# Altium PCB Pannel3.5x2 Ver1.0.PcbDoc (part 1 of 4)
Units mil, origin at the board's own origin, x right, y up, seen from the top; angles counter-clockwise.
Board outline 4133.86 x 2283.46 mil, 4 copper layers (SIGNAL, GROUND, PWR, SIGNAL (Bottom)), stack 61.627 mil thick; 222 components, 165 nets, 808 pads, 673 vias.
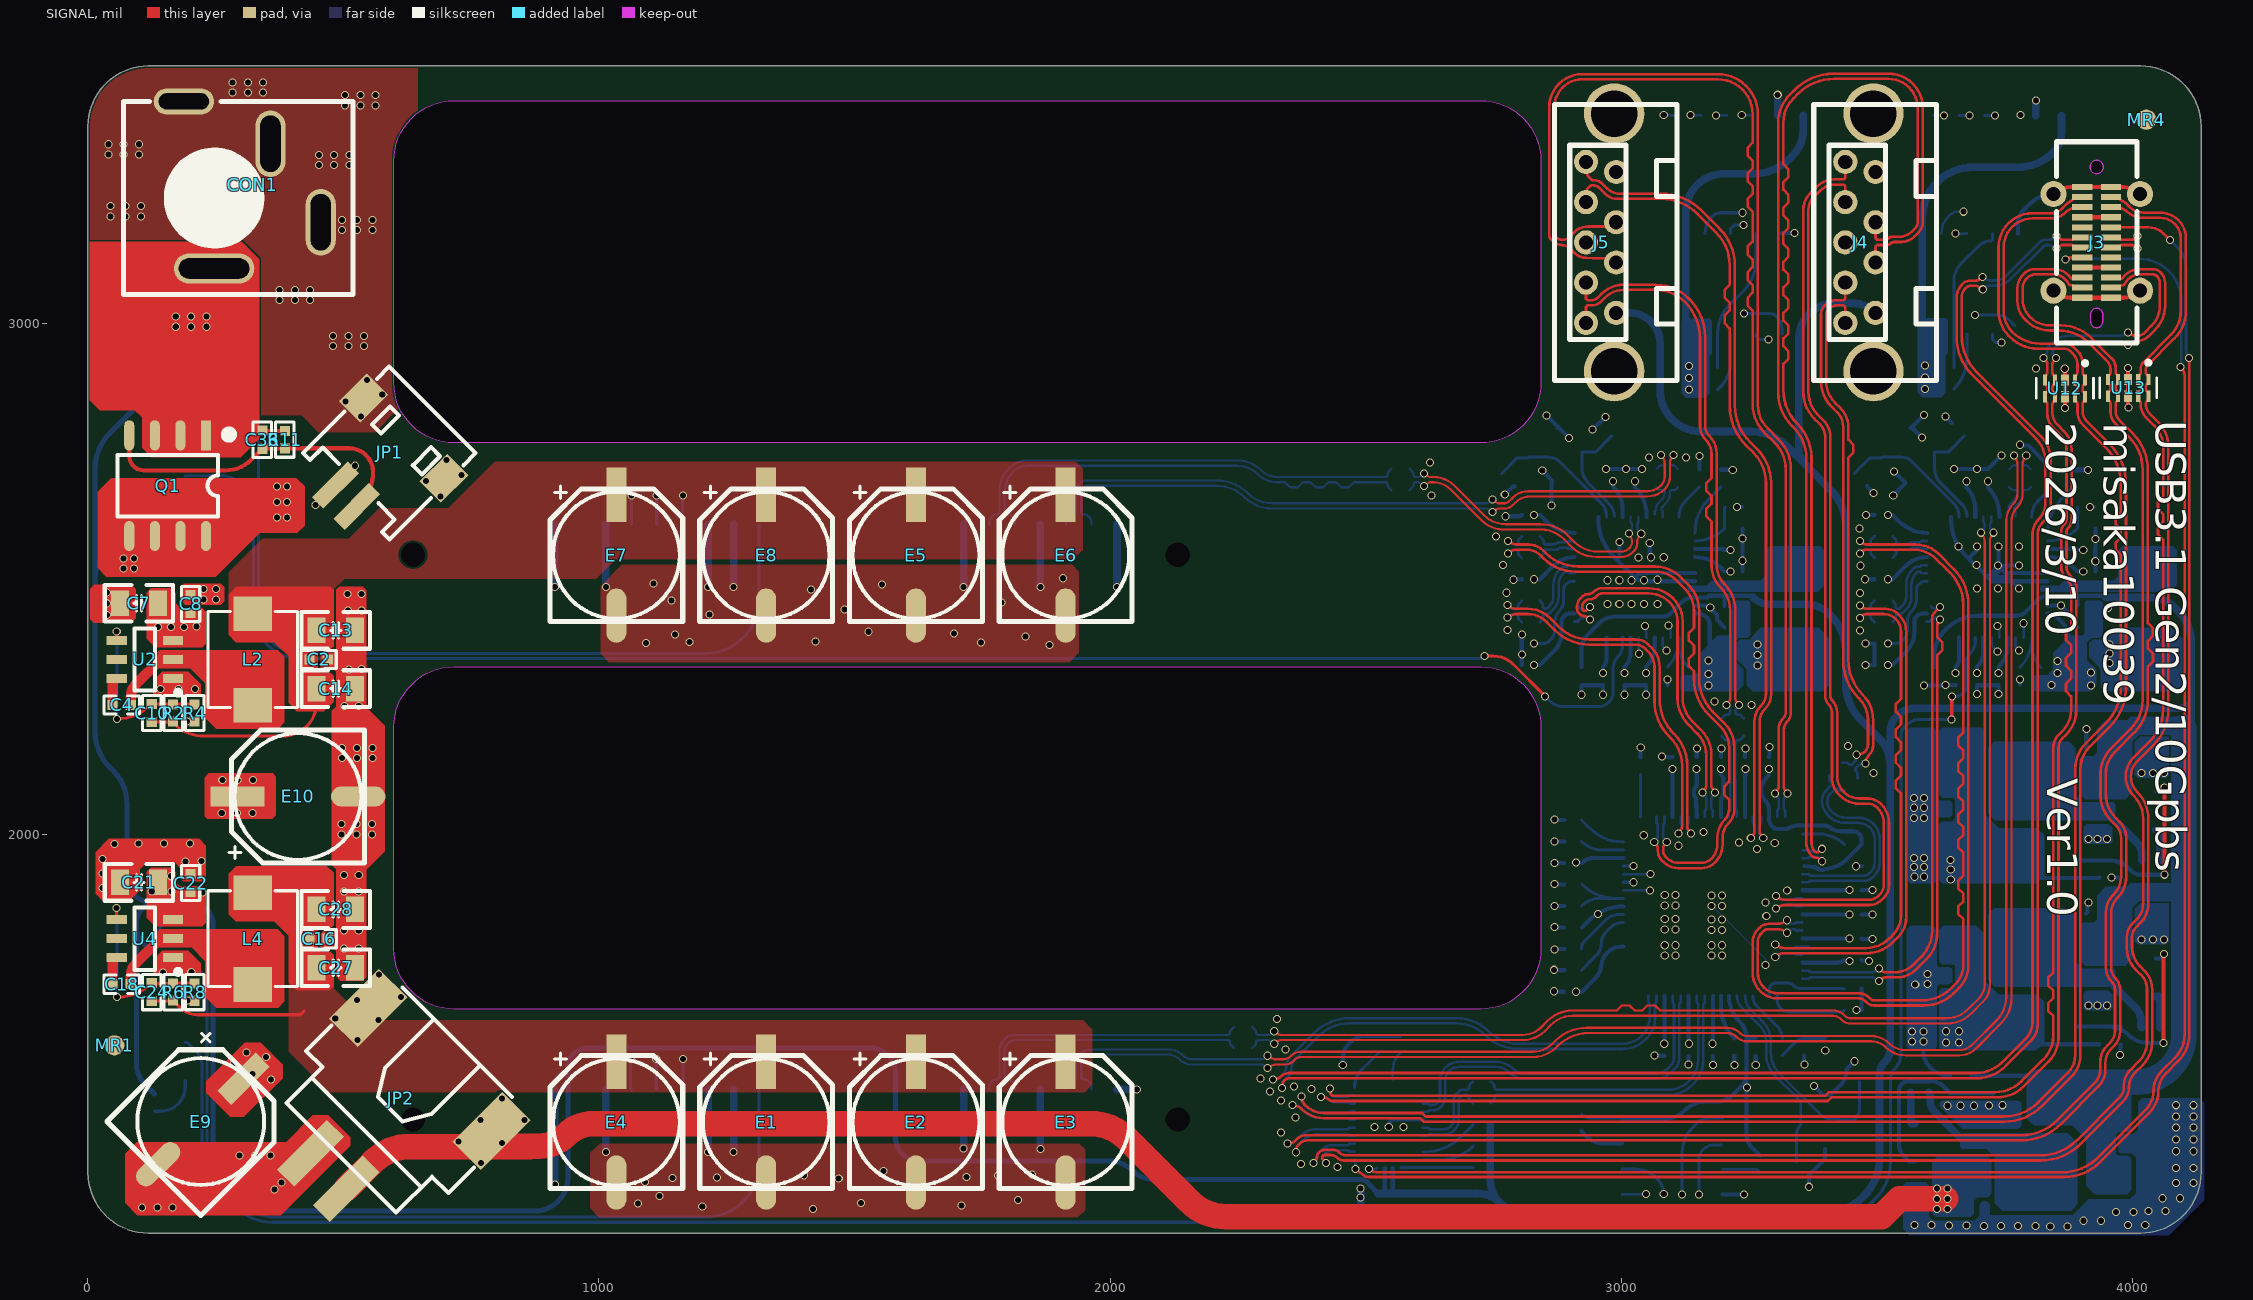
[diagram p0: SIGNAL view]
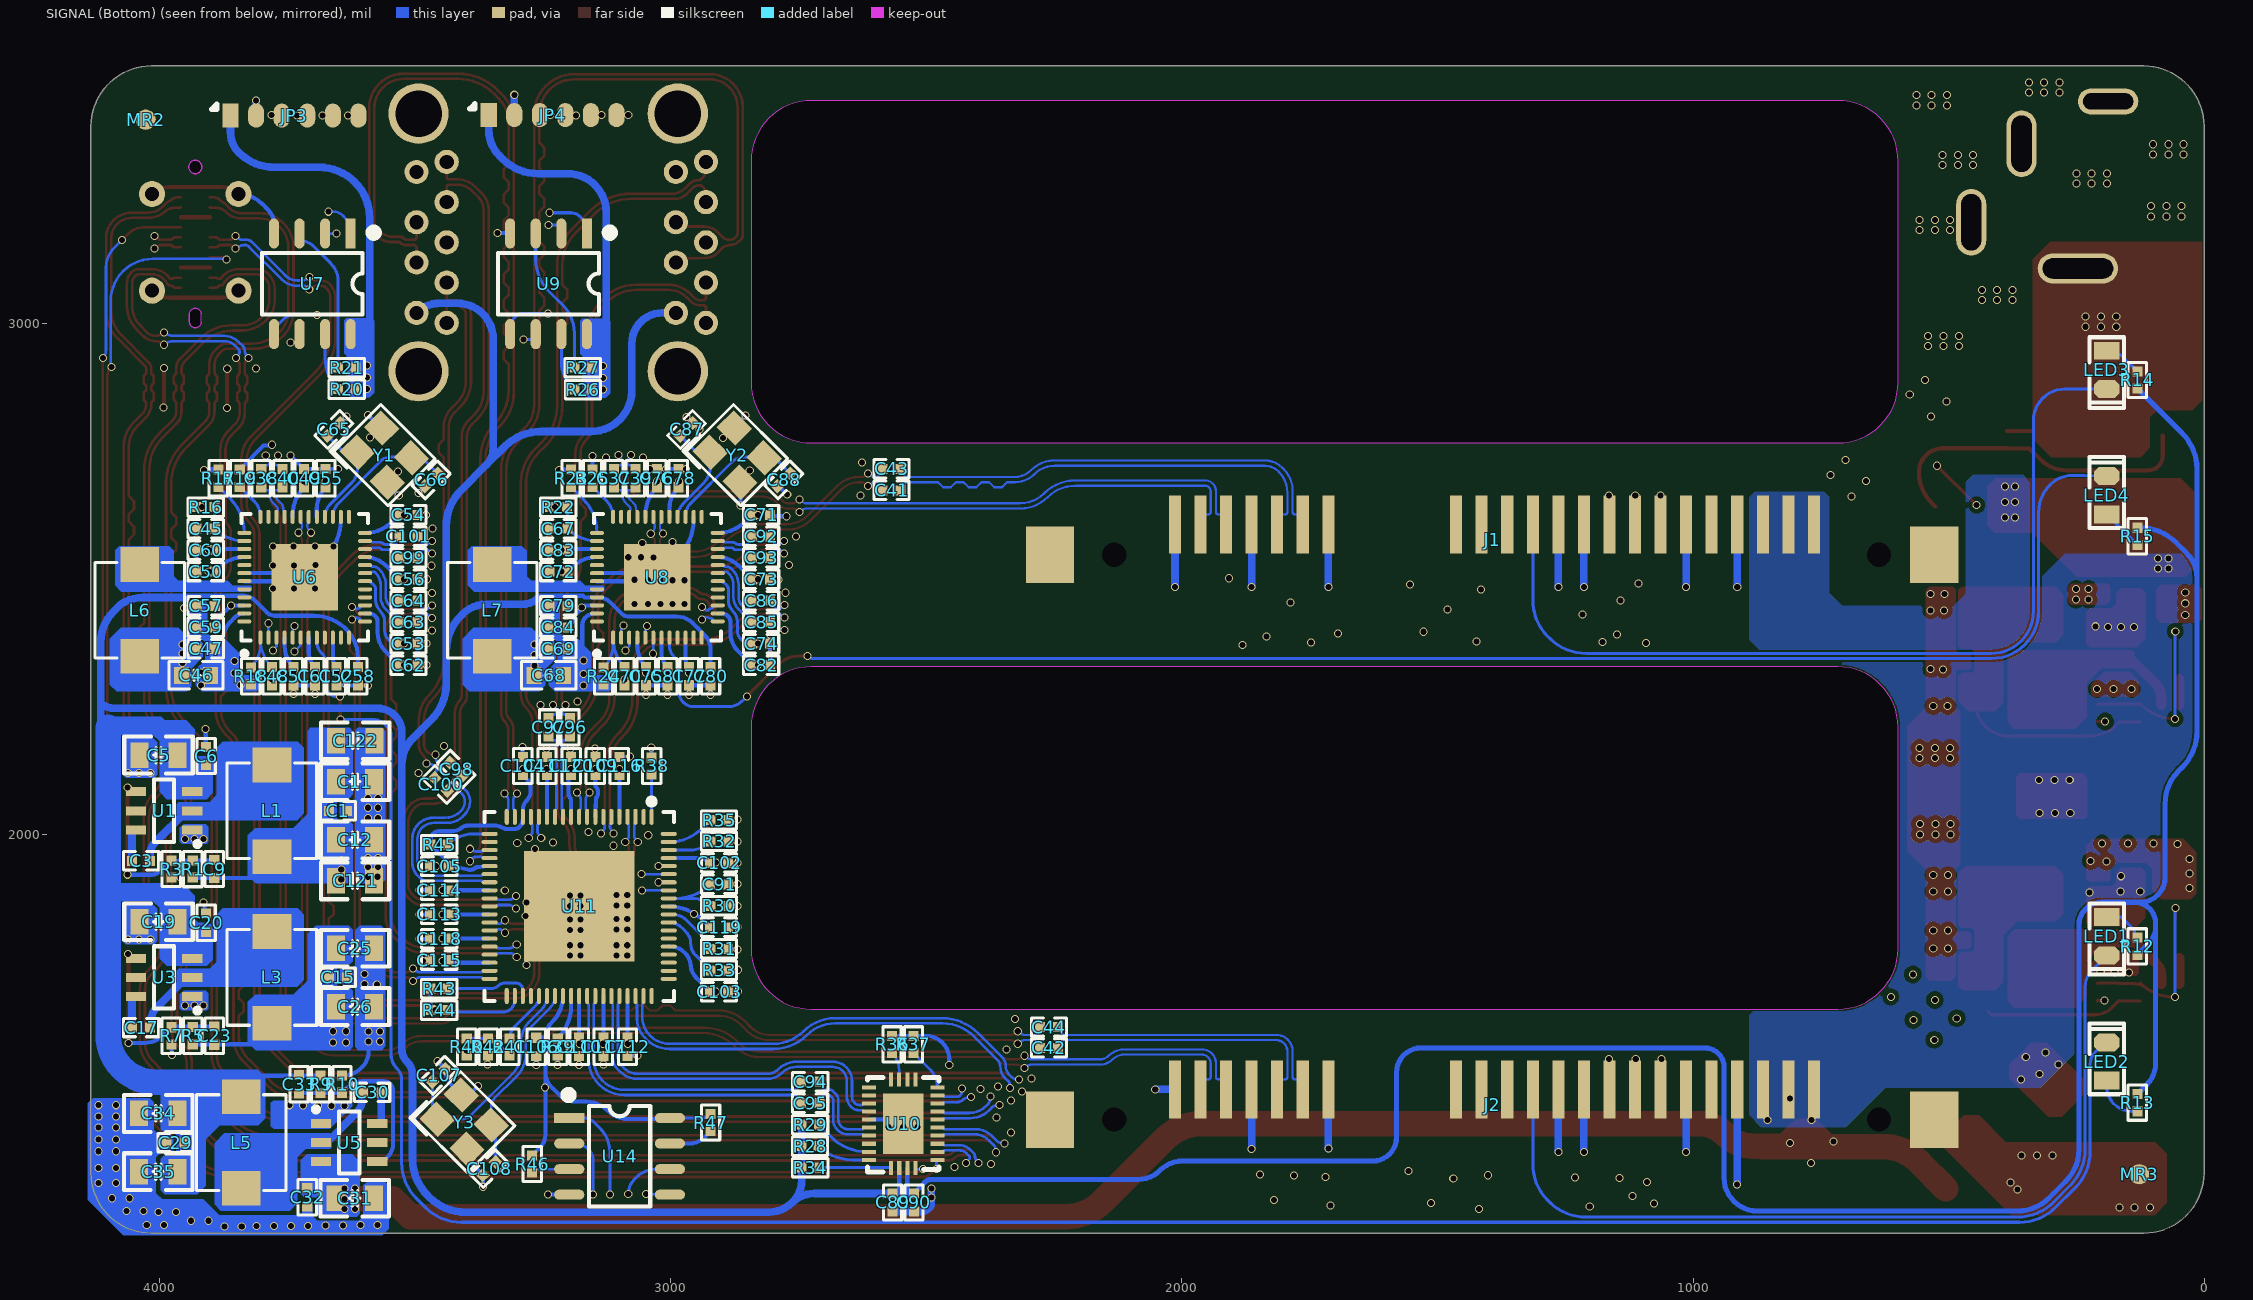
[diagram p1: SIGNAL (Bottom) view, seen from below]
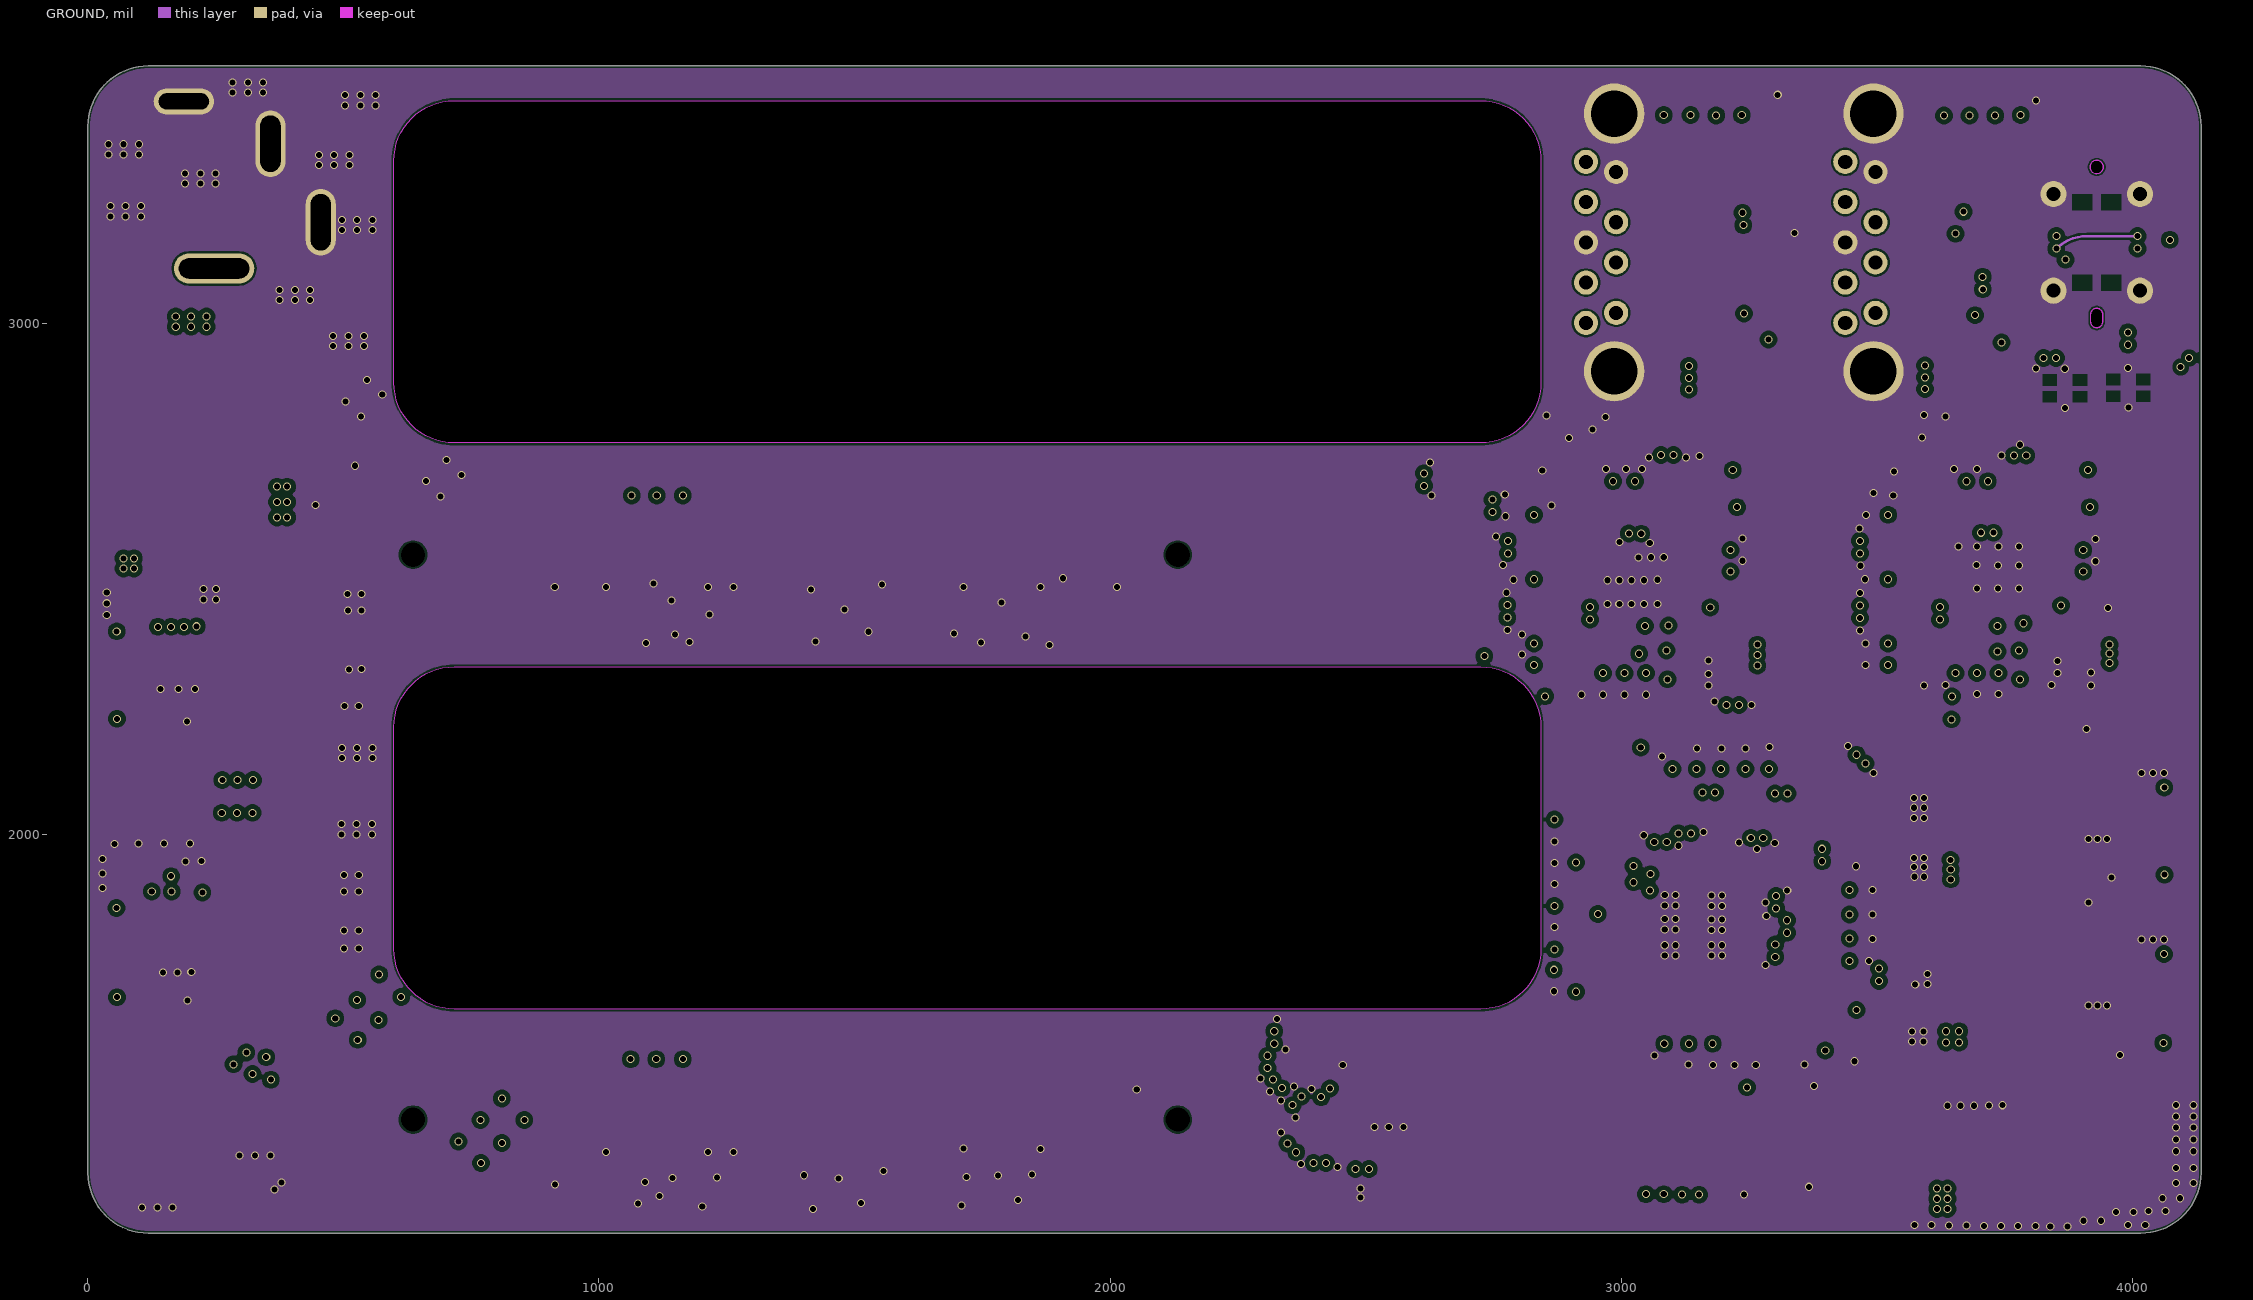
[diagram p2: GROUND]
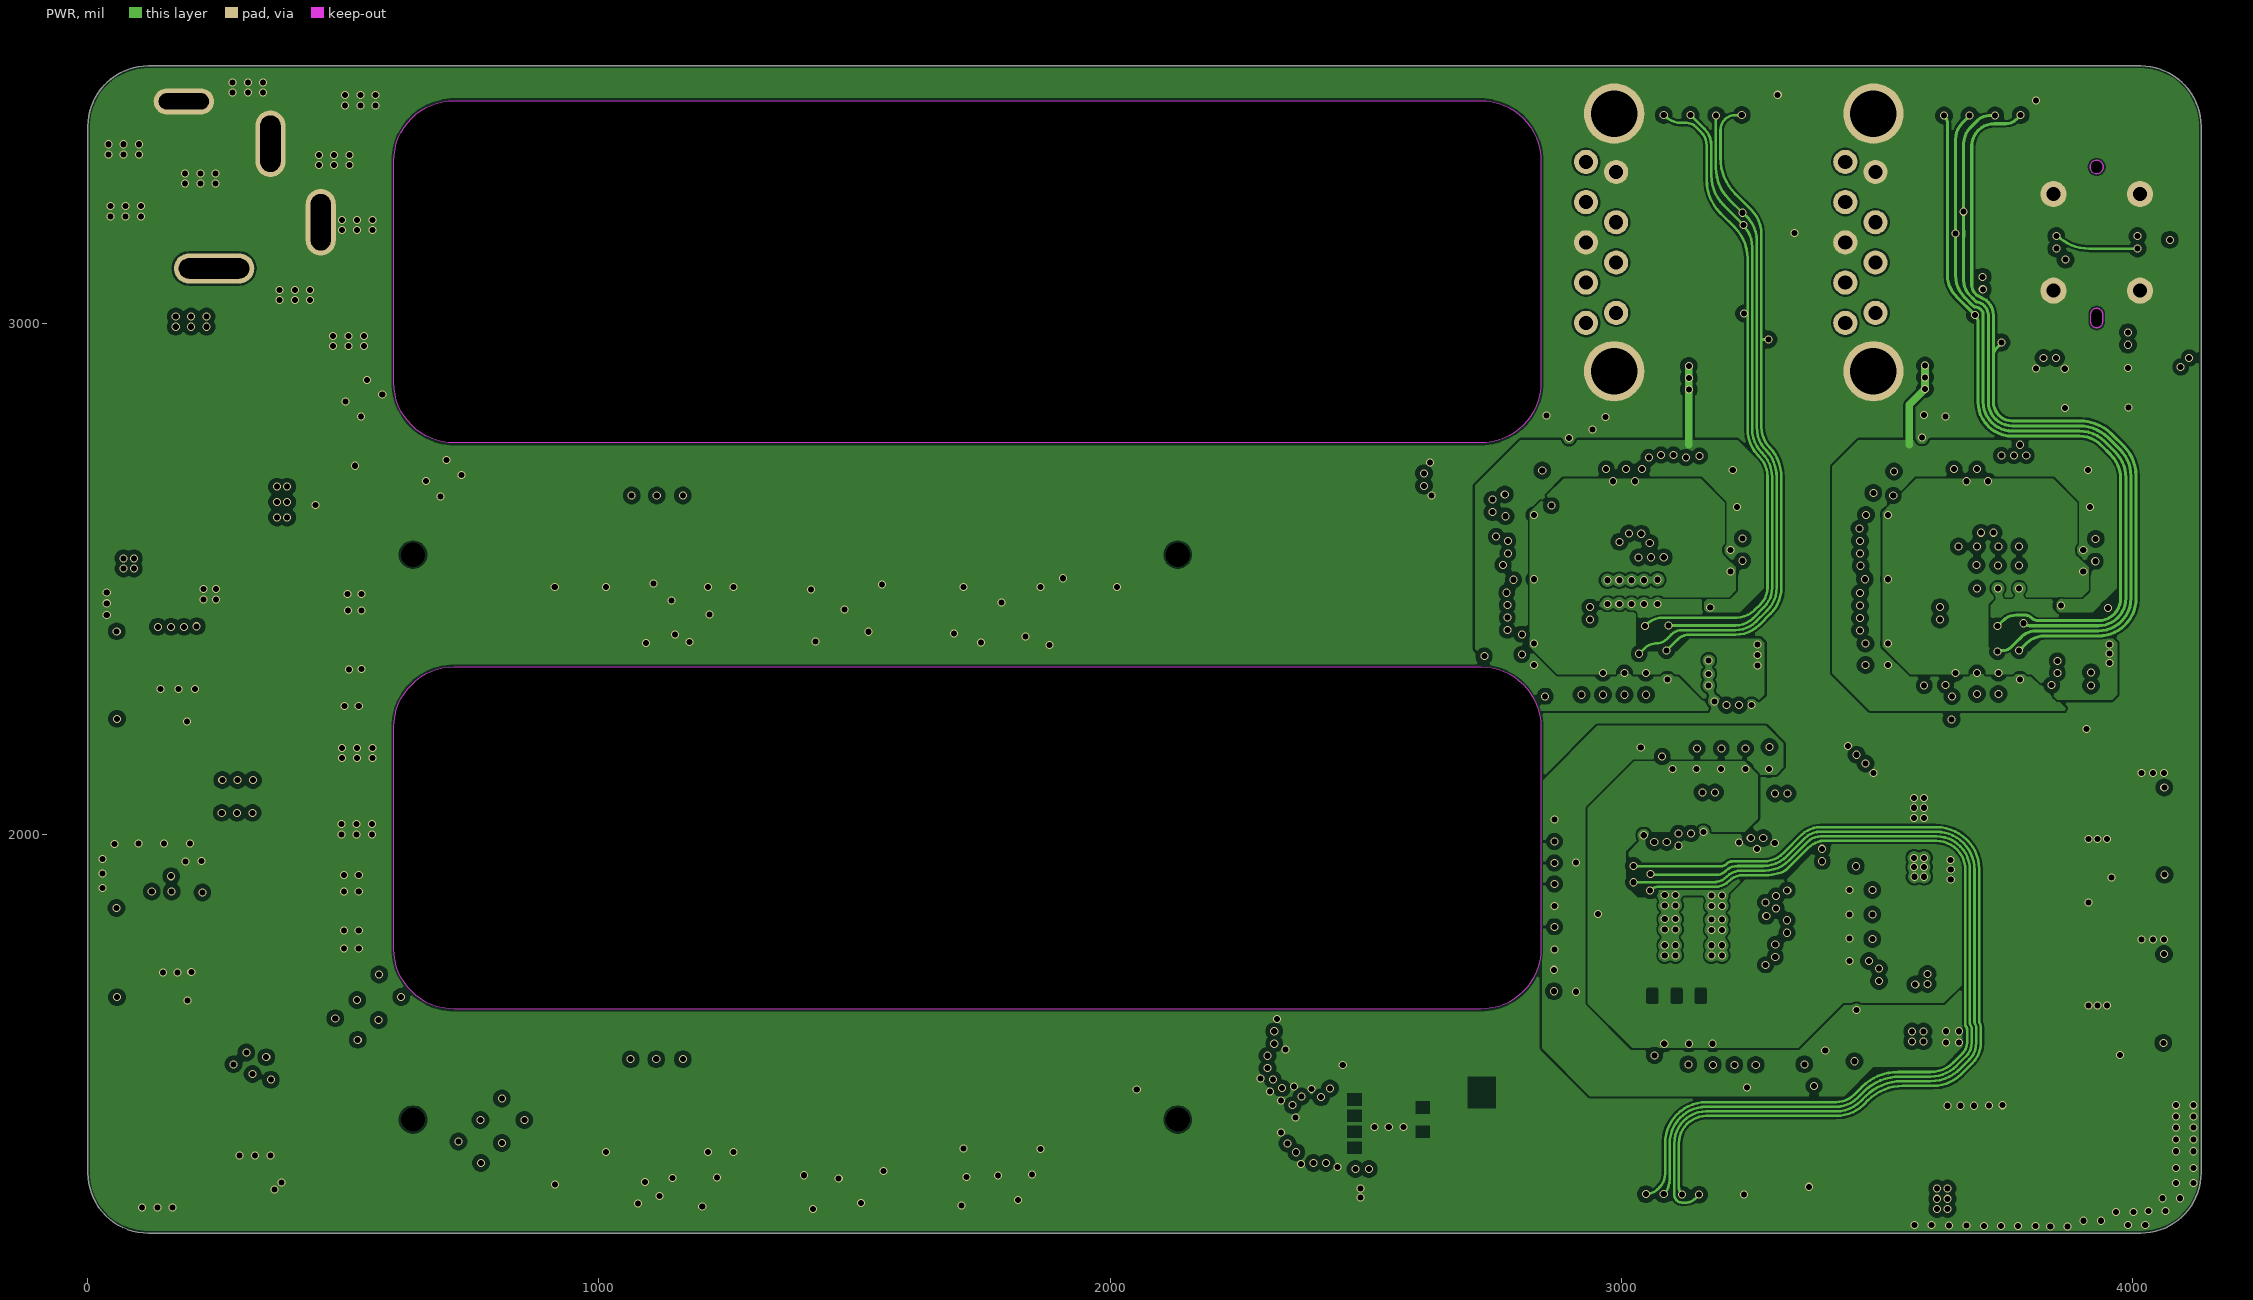
[diagram p3: PWR]
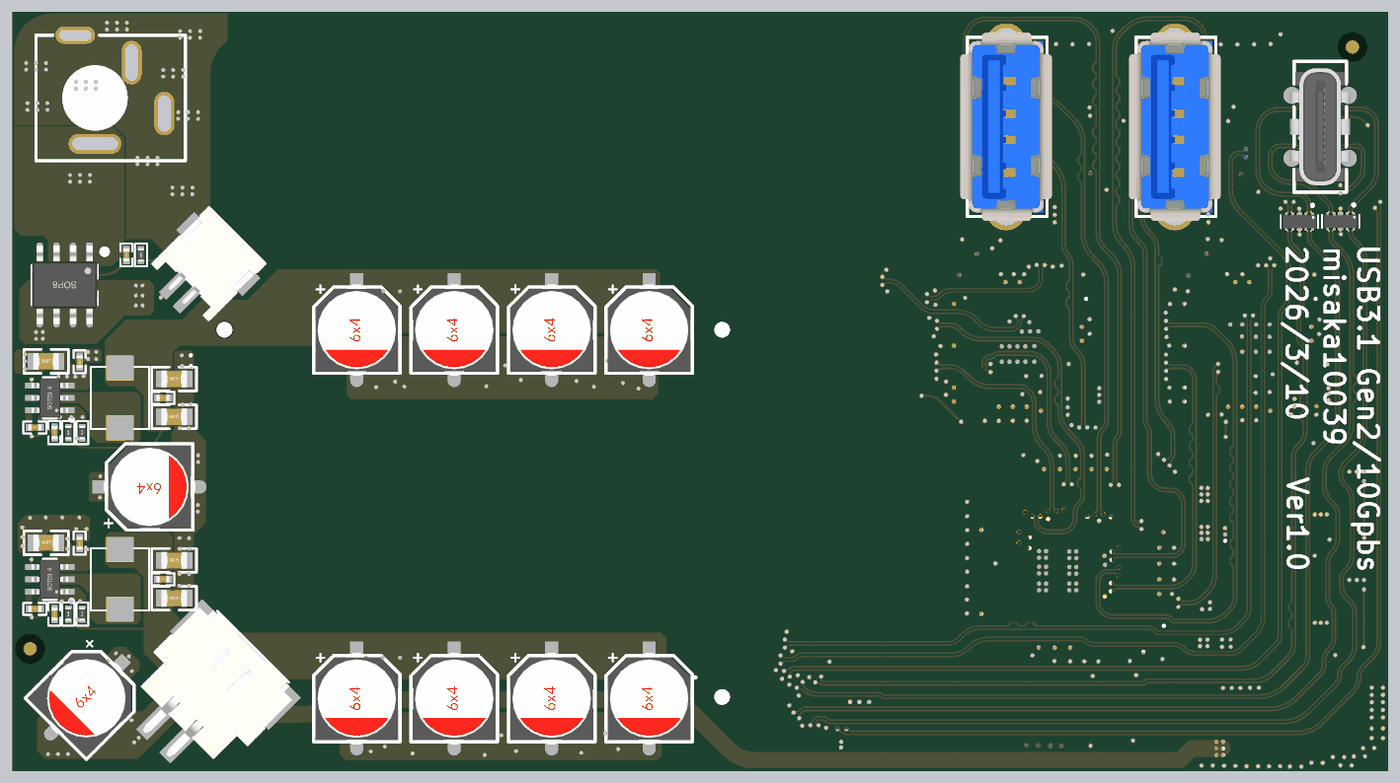
[diagram p7: 3D render of the assembled board from above, using the file's embedded part models]
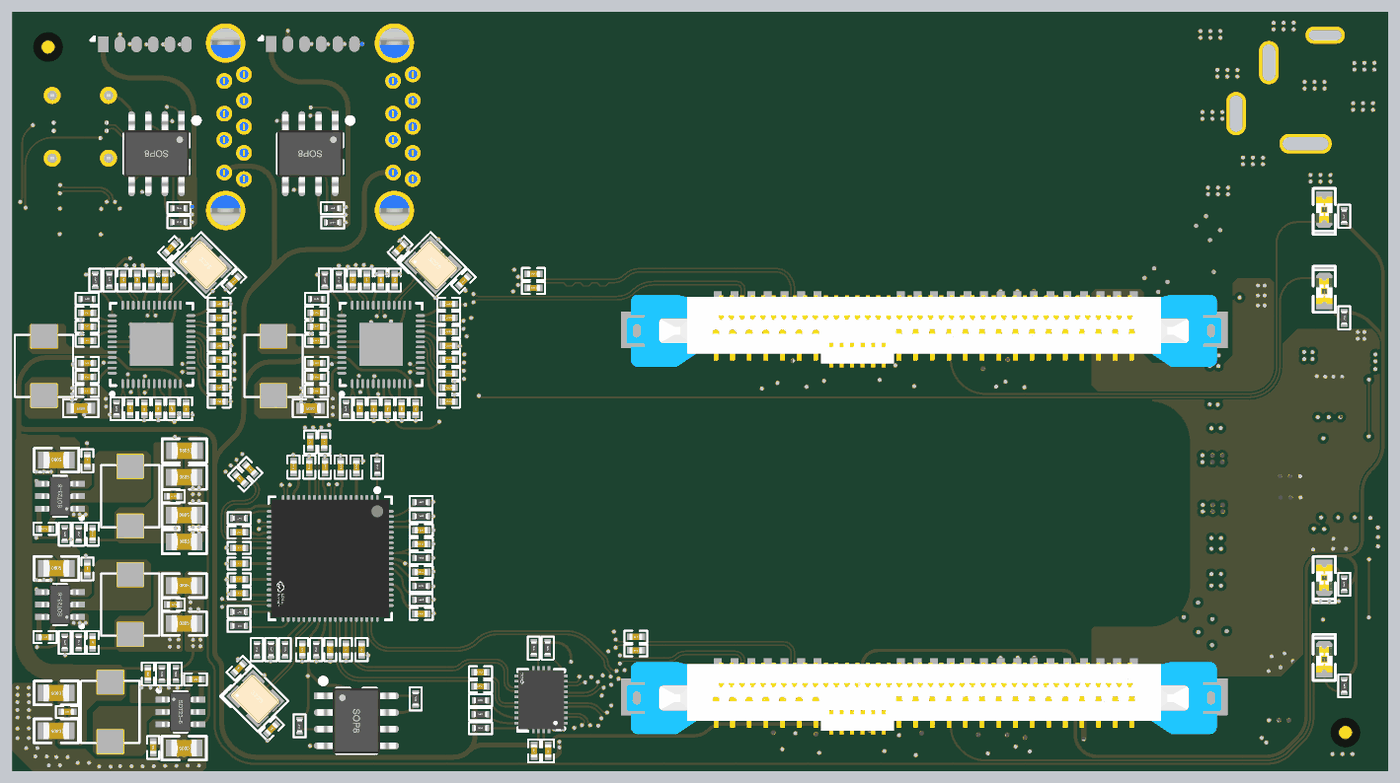
[diagram p8: 3D render of the assembled board from below, using the file's embedded part models]

## Layer stack, top to bottom
Top Solder: solder mask 0.3937, Solder Resist, Dk 3.5
SIGNAL: signal copper 1.4
Dielectric 2: prepreg 3.9134, PP-006, Dk 4.1
GROUND: signal copper 0.5984
Dielectric 1: dielectric 49.8031, FR-4, Dk 4.8
PWR: signal copper 0.5984
Dielectric 3: prepreg 3.9134, PP-006, Dk 4.1
SIGNAL (Bottom): signal copper 1.4
Bottom Solder: solder mask 0.3937, Solder Resist, Dk 3.5

## Board outline
118.36,1219.68 cw(c118.4,1337.84) 0.25,1337.79 0.25,3385.04 cw(c118.34,3385.06) 118.36,3503.15 4016,3503.15 cw(c4016.09,3385.13) 4134.11,3385.04 4134.11,1337.8 cw(c4016.02,1337.78) 4016,1219.69
cut-out: 716.79,2765.63 cw(c716.83,2883.78) 598.68,2883.74 598.68,3317.24 cw(c716.83,3317.2) 716.79,3435.35 2724.66,3435.35 cw(c2724.68,3317.27) 2842.77,3317.24 2842.77,2883.74 cw(c2724.68,2883.72) 2724.66,2765.63
cut-out: 716.79,1657.95 cw(c716.83,1776.11) 598.68,1776.06 598.68,2209.57 cw(c716.83,2209.52) 716.79,2327.68 2724.66,2327.68 cw(c2724.68,2209.59) 2842.77,2209.57 2842.77,1776.06 cw(c2724.68,1776.04) 2724.66,1657.95

## Design rules (kind name [scope] priority, off if disabled: settings)
BoardOutlineClearance [All] p1: gap=4 ignorepadtopadclearanceinfootprint=FALSE
Clearance [All] p1: gap=4 ignorepadtopadclearanceinfootprint=FALSE except(0: Arc-Text Arc-Hole Track-Text Track-Hole SMDPad-Text SMDPad-Hole THPad-Text THPad-Hole Via-Text Via-Hole Fill-Text Fill-Hole Poly-Text Poly-Hole Region-Text Region-Hole Text-Text Text-Hole; 8.66: Via-Via; 9.06: Via-Fill Via-Poly Via-Region)
ComponentClearance [All] p1: gap=0 collisioncheckmode=3 verticalgap=0 showdistances=FALSE
DiffPairsRouting "Schematic Differential Pairs Routing_1" [InNetClass('SATA')] p1: maxlimit=6 minlimit=6 mostfreqgap=6 toplayer_minwidth=4.29 toplayer_maxwidth=4.29 toplayer_prefwidth=4.29 midlayer1_minwidth=4.29 midlayer1_maxwidth=4.29 midlayer1_prefwidth=4.29 midlayer2_minwidth=4.29 midlayer2_maxwidth=4.29 midlayer2_prefwidth=4.29 bottomlayer_minwidth=4.29 bottomlayer_maxwidth=4.29 bottomlayer_prefwidth=4.29 maxuncoupledlength=500
DiffPairsRouting "Schematic Differential Pairs Routing" [InNetClass('USB')] p2: maxlimit=5 minlimit=5 mostfreqgap=5 toplayer_minwidth=5.1 toplayer_maxwidth=5.1 toplayer_prefwidth=5.1 midlayer1_minwidth=5.1 midlayer1_maxwidth=5.1 midlayer1_prefwidth=5.1 midlayer2_minwidth=5.1 midlayer2_maxwidth=5.1 midlayer2_prefwidth=5.1 bottomlayer_minwidth=5.1 bottomlayer_maxwidth=5.1 bottomlayer_prefwidth=5.1 maxuncoupledlength=500
DiffPairsRouting [All] p3: maxlimit=10 minlimit=10 mostfreqgap=10 toplayer_minwidth=15 toplayer_maxwidth=15 toplayer_prefwidth=15 midlayer1_minwidth=15 midlayer1_maxwidth=15 midlayer1_prefwidth=15 midlayer2_minwidth=15 midlayer2_maxwidth=15 midlayer2_prefwidth=15 bottomlayer_minwidth=15 bottomlayer_maxwidth=15 bottomlayer_prefwidth=15 maxuncoupledlength=500
MinimumSolderMaskSliver [All] p1: minsoldermaskwidth=0
NetAntennae [All] p1 off: netantennaetolerance=3.94
PlaneClearance [All] p1: clearance=8
PlaneConnect [All] p1: planeconnectstyle=Direct reliefexpansion=20 reliefentries=4 reliefconductorwidth=10 reliefairgap=10
PolygonConnect [All] p1: connectstyle=Direct reliefconductorwidth=10 reliefentries=4 polygonreliefangle="90 Angle" airgapwidth=10
RoutingVias "Schematic Routing Via Style_58" [InNetClass('USB')] p1: holewidth=11.81 width=15.75 viastyle="Through Hole" minholewidth=7.87 minwidth=11.81 maxholewidth=28 maxwidth=39.37
RoutingVias "Schematic Routing Via Style_1" [InNetClass('SATA')] p2: holewidth=11.81 width=15.75 viastyle="Through Hole" minholewidth=7.87 minwidth=11.81 maxholewidth=28 maxwidth=50
RoutingVias [All] p3: holewidth=11.81 width=15.75 viastyle="Through Hole" minholewidth=11.81 minwidth=15.75 maxholewidth=19.68 maxwidth=23.62
SilkToSolderMaskClearance [IsPad] p1: minsilkscreentomaskgap=0 clearancetoexposedcopper=TRUE
SolderMaskExpansion 过孔盖油 [isvia] p1: expansion=4 istentingtop=TRUE
Width [All] p1: maxlimit=100 minlimit=2 preferedwidth=6
23 further rules are at their usual default settings.

## Classes and differential pairs
net class USB: cap_SSRX1_N cap_SSRX1_P cap_SSRX4_N cap_SSRX4_P cap_SSTX1_N cap_SSTX1_P cap_SSTX2_N cap_SSTX2_P cap_SSTX3_N cap_SSTX3_P cap_SSTX4_N cap_SSTX4_P cap_SSTX_N cap_SSTX_P HSD1_N HSD1_P HSD2_N HSD2_P HSD3_N HSD3_P HSD4_N HSD4_P IN_CC1 IN_CC2 IN_SSRX1_N IN_SSRX1_P IN_SSRX2_N IN_SSRX2_P IN_SSTX1_N IN_SSTX1_P IN_SSTX2_N IN_SSTX2_P SSRX1_N SSRX1_P SSRX2_N SSRX2_P SSRX3_N SSRX3_P SSRX4_N SSRX4_P SSRX_N SSRX_P SSTX1_N SSTX1_P SSTX2_N SSTX2_P SSTX3_N SSTX3_P SSTX4_N SSTX4_P SSTX_N SSTX_P USBD_N USBD_P
net class SATA: cap_RX1_N cap_RX1_P cap_RX2_N cap_RX2_P cap_TX1_N cap_TX1_P cap_TX2_N cap_TX2_P RX1_N RX1_P RX2_N RX2_P TX1_N TX1_P TX2_N TX2_P
net class PWR: GND VBUS VCC1.05V-VL822 VCC1V2-B VCC1V2-C VCC3.3V-VL822 VCC5V-A VCC5V-B VCC12V VIN
component class vl822: C89 C90 C91 C92 C93 C94 C95 C96 C97 C98 C99 C100 C101 C102 C103 C104 C105 C106 C107 C108 C109 C110 C111 C112 C113 C114 C115 C116 C117 C118 C119 C120 R28 R29 R30 R31 R32 R33 R34 R35 R36 R37 R38 R39 R40 R41 R42 R43 R44 R45 R46 R47 U10 U11 U12 U13 U14 Y3
component class pwr: C1 C2 C3 C4 C5 C6 C7 C8 C9 C10 C11 C12 C13 C14 C15 C16 C17 C18 C19 C20 C21 C22 C23 C24 C25 C26 C27 C28 C29 C30 C31 C32 C33 C34 C35 C36 C121 C122 E1 E2 E3 E4 E5 E6 E7 E8 E9 E10 JP1 JP2 L1 L2 L3 L4 L5 MR1 MR2 MR3 MR4 Q1 R1 R2 R3 R4 R5 R6 R7 R8 R9 R10 R11 U1 U2 U3 U4 U5
component class jmb575: C45 C46 C47 C48 C49 C50 C51 C52 C53 C54 C55 C56 C57 C58 C59 C60 C61 C62 C63 C64 C65 C66 C67 C68 C69 C70 C71 C72 C73 C74 C75 C76 C77 C78 C79 C80 C81 C82 C83 C84 C85 C86 C87 C88 JP3 JP4 L6 L7 R16 R17 R18 R19 R20 R21 R22 R23 R24 R25 R26 R27 U6 U7 U8 U9 Y1 Y2
component class connector: C37 C38 C39 C40 C41 C42 C43 C44 CON1 J1 J2 J3 J4 J5 LED1 LED2 LED3 LED4 R12 R13 R14 R15
differential pair cap_TX1: +cap_TX1_P -cap_TX1_N
differential pair cap_RX1: +cap_RX1_P -cap_RX1_N
differential pair TX1: +TX1_P -TX1_N
differential pair RX1: +RX1_P -RX1_N
differential pair cap_SSRX1: +cap_SSRX1_P -cap_SSRX1_N
differential pair SSTX1: +SSTX1_P -SSTX1_N
differential pair cap_TX2: +cap_TX2_P -cap_TX2_N
differential pair cap_RX2: +cap_RX2_P -cap_RX2_N
differential pair USBD: +USBD_P -USBD_N
differential pair TX2: +TX2_P -TX2_N
differential pair SSTX: +SSTX_P -SSTX_N
differential pair SSTX4: +SSTX4_P -SSTX4_N
differential pair SSTX3: +SSTX3_P -SSTX3_N
differential pair SSTX2: +SSTX2_P -SSTX2_N
differential pair SSRX: +SSRX_P -SSRX_N
differential pair SSRX4: +SSRX4_P -SSRX4_N
differential pair SSRX3: +SSRX3_P -SSRX3_N
differential pair SSRX2: +SSRX2_P -SSRX2_N
differential pair SSRX1: +SSRX1_P -SSRX1_N
differential pair RX2: +RX2_P -RX2_N
differential pair IN_SSTX2: +IN_SSTX2_P -IN_SSTX2_N
differential pair IN_SSTX1: +IN_SSTX1_P -IN_SSTX1_N
differential pair IN_SSRX2: +IN_SSRX2_P -IN_SSRX2_N
differential pair IN_SSRX1: +IN_SSRX1_P -IN_SSRX1_N
differential pair HSD4: +HSD4_P -HSD4_N
differential pair HSD3: +HSD3_P -HSD3_N
differential pair HSD2: +HSD2_P -HSD2_N
differential pair HSD1: +HSD1_P -HSD1_N
differential pair cap_SSTX: +cap_SSTX_P -cap_SSTX_N
differential pair cap_SSTX4: +cap_SSTX4_P -cap_SSTX4_N
differential pair cap_SSTX3: +cap_SSTX3_P -cap_SSTX3_N
differential pair cap_SSTX2: +cap_SSTX2_P -cap_SSTX2_N
differential pair cap_SSTX1: +cap_SSTX1_P -cap_SSTX1_N
differential pair cap_SSRX3: +cap_SSRX4_P -cap_SSRX4_N

## Components (designator, comment, footprint, x,y, rotation, side; value= is the part's Value field where it differs from the comment)
C1 "100nF 50V" C0402_L 3651.08,2046 r180 bottom
C2 "100nF 50V" C0402_L 451.59,2342 r0 top
C3 "100nF 50V" C0402_L 4036,1948 r180 bottom
C4 "100nF 50V" C0402_L 66.28,2253 r0 top
C5 "22uF 10V" C0805_L 4002,2155 r180 bottom
C6 "100nF 50V" C0402_L 3909,2153 r270 bottom
C7 "22uF 25V" C0805_L 100,2452 r0 top
C8 "100nF 50V" C0402_L 201,2450.72 r270 top
C9 "150PF 50V" C0402_L 3893,1932 r270 bottom
C10 "68PF 50V" C0402_L 125,2237.27 r270 top
C11 "47uF 6.3V" C0805_L 3617.6,2103 r180 bottom
C12 "47uF 6.3V" C0805_L 3617.6,1989 r180 bottom
C13 "22uF 10V" C0805_L 485.08,2399 r0 top
C14 "22uF 10V" C0805_L 485.08,2285 r0 top
C15 "100nF 50V" C0402_L 3651.08,1720 r180 bottom
C16 "100nF 50V" C0402_L 451.59,1796 r0 top
C17 "100nF 50V" C0402_L 4036,1622 r180 bottom
C18 "100nF 50V" C0402_L 66.28,1707 r0 top
C19 "22uF 25V" C0805_L 4002,1829 r180 bottom
C20 "100nF 50V" C0402_L 3909,1827 r270 bottom
C21 "22uF 25V" C0805_L 100,1906 r0 top
C22 "100nF 50V" C0402_L 201,1904.72 r270 top
C23 "56PF 50V" C0402_L 3893,1606 r270 bottom
C24 "68PF 50V" C0402_L 125,1691.27 r270 top
C25 "47uF 6.3V" C0805_L 3617.6,1777 r180 bottom
C26 "47uF 6.3V" C0805_L 3617.6,1663 r180 bottom
C27 "22uF 10V" C0805_L 485.08,1739 r0 top
C28 "22uF 10V" C0805_L 485.08,1853 r0 top
C29 "100nF 50V" C0402_L 3968.92,1397 r0 bottom
C30 "100nF 50V" C0402_L 3584,1495 r0 bottom
C31 "22uF 25V" C0805_L 3618,1288 r0 bottom
C32 "100nF 50V" C0402_L 3711,1290 r90 bottom
C33 "68PF 50V" C0402_L 3727,1511 r90 bottom
C34 "22uF 10V" C0805_L 4002.4,1454 r0 bottom
C35 "22uF 10V" C0805_L 4002.4,1340 r0 bottom
C36 "1nF 25V" C0402_L 341.33,2772 r270 top
C37 "10nF 6.3V" C0402_L 3111,2696.72 r270 bottom
C38 "10nF 6.3V" C0402_L 3801,2696.72 r270 bottom
C39 "10nF 6.3V" C0402_L 3069,2696.72 r270 bottom
C40 "10nF 6.3V" C0402_L 3759,2696.72 r270 bottom
C41 "10nF 6.3V" C0402_L 2568,2673 r0 bottom
C42 "10nF 6.3V" C0402_L 2260,1582 r0 bottom
C43 "10nF 6.3V" C0402_L 2568,2715 r0 bottom
C44 "10nF 6.3V" C0402_L 2260,1623 r0 bottom
C45 "1uF 10V" C0402_L 3909.72,2598 r180 bottom
C46 "10uF 6.3V" C0603_L 3928.54,2311 r0 bottom
C47 "100nF 6.3V" C0402_L 3909.72,2363 r0 bottom
C48 "1uF 10V" C0402_L 3780,2309.29 r270 bottom
C49 "100nF 6.3V" C0402_L 3717,2696.72 r270 bottom
C50 "100nF 6.3V" C0402_L 3909.72,2514 r180 bottom
C51 "100nF 6.3V" C0402_L 3738,2309.28 r90 bottom
C52 "100nF 6.3V" C0402_L 3654,2309.28 r90 bottom
C53 "100nF 6.3V" C0402_L 3513,2373 r0 bottom
C54 "100nF 6.3V" C0402_L 3513,2625 r0 bottom
C55 "100nF 6.3V" C0402_L 3675,2696.72 r270 bottom
C56 "100nF 6.3V" C0402_L 3513,2499 r0 bottom
C57 "100nF 6.3V" C0402_L 3909.72,2447 r180 bottom
C58 "100nF 6.3V" C0402_L 3612,2309.28 r90 bottom
C59 "100nF 6.3V" C0402_L 3909.72,2405 r180 bottom
C60 "100nF 6.3V" C0402_L 3909.72,2556 r180 bottom
C61 "100nF 6.3V" C0402_L 3696,2309.28 r90 bottom
C62 "100nF 6.3V" C0402_L 3513,2331 r0 bottom
C63 "100nF 6.3V" C0402_L 3513,2415 r0 bottom
C64 "100nF 6.3V" C0402_L 3513,2457 r0 bottom
C65 "33pF/16V" C0402_L 3659,2792 r135 bottom
C66 "33pF/16V" C0402_L 3468.53,2693.47 r315 bottom
C67 "1uF 10V" C0402_L 3219.72,2598 r180 bottom
C68 "10uF 6.3V" C0603_L 3238.54,2311 r0 bottom
C69 "100nF 6.3V" C0402_L 3219.72,2363 r0 bottom
C70 "1uF 10V" C0402_L 3090,2309.29 r270 bottom
C71 "100nF 6.3V" C0402_L 2823,2625 r0 bottom
C72 "100nF 6.3V" C0402_L 3219.72,2514 r180 bottom
C73 "100nF 6.3V" C0402_L 2823,2499 r0 bottom
C74 "100nF 6.3V" C0402_L 2823,2373 r0 bottom
C75 "100nF 6.3V" C0402_L 3048,2309.28 r90 bottom
C76 "100nF 6.3V" C0402_L 3027,2696.72 r270 bottom
C77 "100nF 6.3V" C0402_L 2964,2309.28 r90 bottom
C78 "100nF 6.3V" C0402_L 2985,2696.72 r270 bottom
C79 "100nF 6.3V" C0402_L 3219.72,2447 r180 bottom
C80 "100nF 6.3V" C0402_L 2922,2309.28 r90 bottom
C81 "100nF 6.3V" C0402_L 3006,2309.28 r90 bottom
C82 "100nF 6.3V" C0402_L 2823,2331 r0 bottom
C83 "100nF 6.3V" C0402_L 3219.72,2556 r180 bottom
C84 "100nF 6.3V" C0402_L 3219.72,2405 r180 bottom
C85 "100nF 6.3V" C0402_L 2823,2415 r0 bottom
C86 "100nF 6.3V" C0402_L 2823,2457 r0 bottom
C87 "33pF/16V" C0402_L 2969,2792 r135 bottom
C88 "33pF/16V" C0402_L 2778.53,2693.47 r315 bottom
C89 "100nF 10V" C0402_L 2566,1279.75 r90 bottom
C90 "4.7uF 10V NC" C0402_L 2524,1279.75 r90 bottom
C91 "100nF 6.3V" C0402_L 2905.28,1902 r180 bottom
C92 "100nF 6.3V" C0402_L 2823,2583 r180 bottom
C93 "100nF 6.3V" C0402_L 2823,2541 r180 bottom
C94 "100nF 6.3V" C0402_L 2727,1516 r0 bottom
C95 "100nF 6.3V" C0402_L 2727.13,1474 r0 bottom
C96 "100nF 6.3V" C0402_L 3197,2209.28 r270 bottom
C97 "100nF 6.3V" C0402_L 3239,2209.28 r270 bottom
C98 "100nF 6.3V" C0402_L 3419.53,2127.53 r225 bottom
C99 "100nF 6.3V" C0402_L 3513,2541 r180 bottom
C100 "100nF 6.3V" C0402_L 3449.53,2097.53 r225 bottom
C101 "100nF 6.3V" C0402_L 3513,2583 r180 bottom
C102 "100nF 6.3V" C0402_L 2905.28,1944 r0 bottom
C103 "100nF 6.3V" C0402_L 2905.28,1692 r0 bottom
C104 "100nF 6.3V" C0402_L 3289.2,2133.71 r270 bottom
C105 "100nF 6.3V" C0402_L 3452.72,1937.7 r180 bottom
C106 "100nF 6.3V" C0402_L 3263,1584.28 r90 bottom
C107 "22pF/16V" C0402_L 3453.53,1528.47 r135 bottom
C108 "22pF/16V" C0402_L 3355,1346 r315 bottom
C109 "100nF 6.3V" C0402_L 3147.5,2133.72 r270 bottom
C110 "100nF 6.3V" C0402_L 3179,1584.28 r90 bottom
C111 "100nF 6.3V" C0402_L 3242,2133.72 r270 bottom
C112 "100nF 6.3V" C0402_L 3084.5,1584.28 r90 bottom
C113 "100nF 6.3V" C0402_L 3452.72,1843.3 r180 bottom
C114 "100nF 6.3V" C0402_L 3452.72,1890.5 r180 bottom
C115 "100nF 6.3V" C0402_L 3452.72,1754 r180 bottom
C116 "100nF 6.3V" C0402_L 3100.3,2133.72 r270 bottom
C117 "100nF 6.3V" C0402_L 3131.8,1584.28 r90 bottom
C118 "100nF 6.3V" C0402_L 3452.72,1796 r180 bottom
C119 "100nF 6.3V" C0402_L 2905.28,1818 r0 bottom
C120 "100nF 6.3V" C0402_L 3194.7,2133.72 r270 bottom
C121 "47uF 6.3V" C0805_L 3617.5,1908.99 r180 bottom
C122 "47uF 6.3V" C0805_L 3617,2183 r180 bottom
CON1 "3.5*1.3" DC-012G-2.5 321.81,3270.38 r90 top
E1 "47uF/16V" "CS 6*4 - R" 1327,1437 r90 top
E2 "47uF/16V" "CS 6*4 - R" 1620,1437 r90 top
E3 "47uF/16V" "CS 6*4 - R" 1913,1437 r90 top
E4 "47uF/16V" "CS 6*4 - R" 1034,1437 r90 top
E5 "47uF/16V" "CS 6*4 - R" 1620,2546 r90 top
E6 "47uF/16V" "CS 6*4 - R" 1913,2546 r90 top
E7 "47uF/16V" "CS 6*4 - R" 1034,2546 r90 top
E8 "47uF/16V" "CS 6*4 - R" 1327,2546 r90 top
E9 "47uF/16V" "CS 6*4 - R" 221,1438 r45 top
E10 "47uF/16V" "CS 6*4 - R" 411,2074 r180 top
J1 "SATA15P" "SATA 15P 贴片" 2132.33,2547.04 r180 bottom locked
J2 "SATA15P" "SATA 15P 贴片" 2132.33,1441.78 r180 bottom locked
J3 "TYPEC-501S-ACP24H92" "TypeC 24p 直立" 3930,3158 r270 top locked
J4 "USB3.1_Type-A" "USB3.1_Type-A 立式直插" 3467.68,3158 r90 top locked
J5 "USB3.1_Type-A" "USB3.1_Type-A 立式直插" 2960.4,3158 r90 top locked
JP1 "HDR-1X2" ZH1.5-WS-2P 618,2775 r135 top
JP2 "HDR-1X2" XH2.54-WS-2P 609.21,1480 r135 top
JP3 "HDR-1X6" 6p烧录点 3736,3406 r180 bottom
JP4 "HDR-1X6" 6p烧录点 3231,3407 r180 bottom
L1 "1.5uH" SMMS0420 3780,2046 r90 bottom
L2 "10uH" SMMS0420 322.37,2342 r270 top
L3 "4.7uH" SMMS0420 3780,1720 r90 bottom
L4 "10uH" SMMS0420 322.37,1796 r270 top
L5 "10uH" SMMS0420 3840,1397 r270 bottom
L6 "4.7uH" SMMS0420 4039,2438.32 r90 bottom
L7 "4.7uH" SMMS0420 3349,2438.32 r90 bottom
LED1 "blue" "LED 0805B" 190.61,1800.53 r270 bottom
LED2 "green" "LED 0805G" 190.62,1555.44 r90 bottom
LED3 "blue" "LED 0805B" 190.61,2908.51 r270 bottom
LED4 "green" "LED 0805G" 190.62,2663.42 r90 bottom
MR1 "MARK1.6" "Mark 1" 52,1587 r0 top
MR2 "MARK1.6" "Mark 1" 4027,3398 r180 bottom
MR3 "MARK1.6" "Mark 1" 127,1335 r180 bottom
MR4 "MARK1.6" "Mark 1" 4027,3398 r0 top
Q1 "Pmos_SOP8" SOP8_L 156,2682 r270 top
R1 "51K 1%" R0402_L 3935,1932 r90 bottom
R2 "100K 1%" R0402_L 167,2237.27 r90 top
R3 "62K 1%" R0402_L 3977,1931.87 r270 bottom
R4 "13.7K 1%" R0402_L 209,2237.14 r270 top
R5 "100K 1%" R0402_L 3935,1606 r90 bottom
R6 "100K 1%" R0402_L 167,1691.27 r90 top
R7 "22.1K 1%" R0402_L 3977,1605.87 r270 bottom
R8 "13.7K 1%" R0402_L 209,1691.14 r270 top
R9 "100K 1%" R0402_L 3685,1511 r270 bottom
R10 "13.7K 1%" R0402_L 3643,1511.13 r90 bottom
R11 "10K 1%" R0402_L 385.33,2772 r270 top
R12 "4.7K 1%" R0402_L 130.61,1780.98 r90 bottom
R13 "4.7K 1%" R0402_L 130.61,1474.98 r270 bottom
R14 "4.7K 1%" R0402_L 130.61,2888.98 r90 bottom
R15 "4.7K 1%" R0402_L 130.61,2582.98 r270 bottom
R16 "330K 1%" R0402_L 3909.59,2640 r180 bottom
R17 "4.7K 1%" R0402_L 3885,2696.59 r270 bottom
R18 "100K 1%" R0402_L 3821.39,2309.41 r90 bottom
R19 "12K 1%" R0402_L 3843,2696.59 r270 bottom
R20 "10K 1%" R0402_L 3633.73,2871 r0 bottom
R21 "10K 1%" R0402_L 3633.73,2913 r0 bottom
R22 "330K 1%" R0402_L 3219.59,2640 r180 bottom
R23 "4.7K 1%" R0402_L 3195,2696.59 r270 bottom
R24 "100K 1%" R0402_L 3131.39,2309.41 r90 bottom
R25 "12K 1%" R0402_L 3153,2696.59 r270 bottom
R26 "10K 1%" R0402_L 3171.73,2870 r0 bottom
R27 "10K 1%" R0402_L 3171.73,2913 r180 bottom
R28 "10K 1%" R0402_L 2727.25,1390 r180 bottom
R29 "10K 1%" R0402_L 2727,1432 r180 bottom
R30 "4.7K 1%" R0402_L 2905.27,1860 r180 bottom
R31 "4.7K 1%" R0402_L 2905.27,1776 r180 bottom
R32 "4.7K 1%" R0402_L 2905.27,1986 r180 bottom
R33 "4.7K 1%" R0402_L 2905.27,1734 r180 bottom
R34 "10K 1%" R0402_L 2727,1348 r0 bottom
R35 "4.7K 1%" R0402_L 2905.27,2028 r180 bottom
R36 "20K 1%" R0402_L 2567,1589 r270 bottom
R37 "20K 1%" R0402_L 2525,1589 r270 bottom
R38 "4.7K 1%" R0402_L 3037.3,2133.84 r90 bottom
R39 "12.4k 1%" R0402_L 3221,1584.16 r270 bottom
R40 "4.7K 1%" R0402_L 3399,1584.16 r270 bottom
R41 "1M 1%" R0402_L 3315,1584.16 r270 bottom
R42 "10K 1%" R0402_L 3357,1584.16 r270 bottom
R43 "4.7K 1%" R0402_L 3453,1698 r0 bottom
R44 "4.7K 1%" R0402_L 3453,1656 r0 bottom
R45 "4.7K 1%" R0402_L 3452.84,1980 r0 bottom
R46 "10K 1%" R0402_L 3271,1355 r90 bottom
R47 "10K 1%" R0402_L 2922,1436 r270 bottom
U1 "TPS54202DDCR" SOT23-6L 3991,2046 r90 bottom
U2 "TPS54202DDCR" SOT23-6L 111.67,2342 r90 top
U3 "TPS54202DDCR" SOT23-6L 3991,1720 r90 bottom
U4 "TPS54202DDCR" SOT23-6L 111.67,1796 r90 top
U5 "TPS54202DDCR" SOT23-6L 3629,1397 r270 bottom
U6 "JMS578" QFN48-L6.0-W6.0-P0.4 3716,2503 r90 bottom
U7 "P25Q21H" SOP8_L 3701,3077 r270 bottom
U8 "JMS578" QFN48-L6.0-W6.0-P0.4 3026,2503 r90 bottom
U9 "P25Q21H" SOP8_L 3239,3077 r270 bottom
U10 "VL160" MQFN-28_L4.5-W3.5-P0.40-BL-EP 2545,1434 r90 bottom
U11 "VL822 Q7" QFN-76_L9.0-W9.0-P0.40-EP6.3-TL 3179,1859 r270 bottom
U12 "TPD4E02B04" DIO_TPD4E02B04DQAR 3867.89,2872.35 r270 top
U13 "TPD4E02B04" DIO_TPD4E02B04DQAR 3991.63,2873.44 r270 top
U14 "P25Q21H" SOP8_L 3100,1370 r180 bottom
Y1 "30Mhz" "OSC 3225-4P" 3560,2742 r225 bottom
Y2 "30Mhz" "OSC 3225-4P" 2870,2742 r225 bottom
Y3 "25Mhz" "OSC 3225-4P" 3404,1437 r225 bottom

## Footprints (in the part's own frame and the unit in brackets; to place one, negate y for a bottom-side part, rotate by r counter-clockwise, add the part's x,y. Pads: shape width x height; smd on the part's side, far side on the other; paste and mask are expansions set on the pad)
6p烧录点 [mm] "6p烧录点 1.27mm"
  rect 0.8x1.2 smd: 1(-3.175,0)
  oval 0.8x1.2 smd: 2(-1.905,0) 3(-0.635,0) 4(0.635,0) 5(1.905,0) 6(3.175,0)
  silkscreen extent -4.11,0.32 -3.86,0.57
C0402_L [mm] "贴片MLCC电容"
  rect 0.5x0.5 smd: 1(-0.45,0) 2(0.45,0)
  silkscreen extent -0.87,-0.46 0.88,0.46, body extent -0.5,-0.25 0.5,0.25, height 0.5
C0603_L [mm] "贴片MLCC电容"
  rect 0.75x0.85 smd: 1(-0.725,0) 2(0.725,0)
  silkscreen extent -1.35,-0.69 1.35,0.69, body extent -0.8,-0.4 0.8,0.4, height 0.8
C0805_L [mil] "贴片MLCC电容"
  rect 35x50 smd: 1(-37.4,0) 2(37.4,0)
  silkscreen extent -67,-36 67,36, body extent -39,-26 39,26, height 51
"CS 6*4 - R" [mm] "直径6mm，高4mm"
  rect 2.7x1 smd: 1(3,0)
  oval 2.7x1 smd: 2(-3,0)
  silkscreen extent -3.3,-3.3 3.43,3.3, body extent -3.5,-3.15 3.5,3.15, height 4.05
DC-012G-2.5 [mm] "插件立式DC电源接口"
  oval 1.5x4 hole 1 slot 3.5 at 90 deg paste-2539.97: 1(-4.15,1.9)
  oval 3.3x1.5 hole 1 slot 2.8 at 0 deg paste-2539.97: 2(-1.85,-3.4) 3(2.05,-0.9)
  oval 1.3x3 hole 0.8 slot 2.5 at 90 deg copper offset 0,0 paste-2539.97: 4(4.15,3.4)
  silkscreen extent -5.45,-5 4.15,6.4, body extent -5.36,-4.77 4.24,6.64, height 14.5
DIO_TPD4E02B04DQAR [mm]
  rect 0.565x0.2 smd mask+0: 1(-0.417,1) 2(-0.417,0.5) 4(-0.417,-0.5) 5(-0.417,-1) 6(0.417,-1) 7(0.417,-0.5) 9(0.417,0.5) 10(0.417,1)
  rect 0.565x0.4 smd paste-1 mask+0: 3(-0.417,0) 8(0.417,0)
  silkscreen extent -1.35,-1.42 0.5,1.42, body extent -0.5,-1.25 0.5,1.25, height 0.55
"LED 0805B" [mil] "蓝色0805LED"
  rect 35x50 smd: 1(-37.4,-0.01)
  oct 35x50 smd: 2(37.4,-0.01)
  silkscreen extent -64,-33 75,33, body extent -39,-25 39,25, height 32
"LED 0805G" [mil] "绿色0805LED"
  rect 35x50 smd: 1(-37.4,0)
  oct 35x50 smd: 2(37.4,0)
  silkscreen extent -64,-33 75,33, body extent -39,-25 39,25, height 32
"Mark 1" [mm] "光学定位点，直径1mm"
  round 1 smd paste-1 mask+0.635: Mark(0,0)
  SIGNAL pour cut-out: 0,-1.143 -0.437,-1.056 -0.808,-0.808 -1.056,-0.437 -1.143,0 -1.143,0 -1.056,0.437 -0.808,0.808 -0.437,1.056 0,1.143 0,1.143 0.437,1.056 0.808,0.808 1.056,0.437 1.143,0 1.143,0 1.056,-0.437 0.808,-0.808 0.437,-1.056 0,-1.143
MQFN-28_L4.5-W3.5-P0.40-BL-EP [mm]
  rect 0.2x0.7 smd paste-100: 1(-1.8,-1.7) 2(-1.4,-1.7) 3(-1,-1.7) 4(-0.6,-1.7) 5(-0.2,-1.7) 6(0.2,-1.7) 7(0.6,-1.7) 8(1,-1.7) 9(1.4,-1.7) 10(1.8,-1.7) 15(1.8,1.7) 16(1.4,1.7) 17(1,1.7) 18(0.6,1.7) 19(0.2,1.7) 20(-0.2,1.7) 21(-0.6,1.7) 22(-1,1.7) 23(-1.4,1.7) 24(-1.8,1.7)
  rect 0.7x0.2 smd paste-100: 11(2.2,-0.6) 12(2.2,-0.2) 13(2.2,0.2) 14(2.2,0.6) 25(-2.2,0.6) 26(-2.2,0.2) 27(-2.2,-0.2) 28(-2.2,-0.6)
  rect 3x2 smd paste-100: 29(0,0)
  silkscreen extent -2.41,-1.78 2.29,1.78, body extent -2.26,-1.76 2.26,1.76, height 0.86
"OSC 3225-4P" [mm] "3.2*2.5*0.7mm(长宽高)"
  rect 1.3x1.2 smd: 1(-1.05,-0.85) 2(1.05,-0.85) 3(1.05,0.85) 4(-1.05,0.85)
  silkscreen extent -2.03,-1.75 1.9,1.65, body extent -1.6,-1.25 1.6,1.25, height 0.7
QFN48-L6.0-W6.0-P0.4 [mm] "QFN, 48-Leads, Body 6.00x6.00mm, Pitch 0.40mm, Thermal Pad 4.30x4.30mm封装库来自淘宝卖家 ID：黄晶宝石"
  oval 0.7x0.2 smd: 1(-3,2.2) 2(-3,1.8) 3(-3,1.4) 4(-3,1) 5(-3,0.6) 6(-3,0.2) 7(-3,-0.2) 8(-3,-0.6) 9(-3,-1) 10(-3,-1.4) 11(-3,-1.8) 12(-3,-2.2) 25(3,-2.2) 26(3,-1.8) 27(3,-1.4) 28(3,-1) 29(3,-0.6) 30(3,-0.2) 31(3,0.2) 32(3,0.6) 33(3,1) 34(3,1.4) 35(3,1.8) 36(3,2.2)
  oval 0.2x0.7 smd: 13(-2.2,-3) 14(-1.8,-3) 15(-1.4,-3) 16(-1,-3) 17(-0.6,-3) 18(-0.2,-3) 19(0.2,-3) 20(0.6,-3) 21(1,-3) 22(1.4,-3) 23(1.8,-3) 24(2.2,-3) 37(2.2,3) 38(1.8,3) 39(1.4,3) 40(1,3) 41(0.6,3) 42(0.2,3) 43(-0.2,3) 44(-0.6,3) 45(-1,3) 46(-1.4,3) 47(-1.8,3) 48(-2.2,3)
  rect 3.3x3.3 smd: 49(0,0)
  silkscreen extent -3.92,-3.15 3.15,3.15, body extent -3,-3 3,3, height 0.9
QFN-76_L9.0-W9.0-P0.40-EP6.3-TL [mm]
  oval 0.8x0.2 smd paste-100: 1(-4.45,3.599) 2(-4.45,3.2) 3(-4.45,2.799) 4(-4.45,2.4) 5(-4.45,1.999) 6(-4.45,1.6) 7(-4.45,1.199) 8(-4.45,0.8) 9(-4.45,0.399) 10(-4.45,0) 11(-4.45,-0.399) 12(-4.45,-0.8) 13(-4.45,-1.199) 14(-4.45,-1.6) 15(-4.45,-1.999) 16(-4.45,-2.4) 17(-4.45,-2.799) 18(-4.45,-3.2) 19(-4.45,-3.599) 39(4.45,-3.599) 40(4.45,-3.2) 41(4.45,-2.799) 42(4.45,-2.4) 43(4.45,-1.999) 44(4.45,-1.6) 45(4.45,-1.199) 46(4.45,-0.8) 47(4.45,-0.399) 48(4.45,0) 49(4.45,0.399) 50(4.45,0.8) 51(4.45,1.199) 52(4.45,1.6) 53(4.45,1.999) 54(4.45,2.4) 55(4.45,2.799) 56(4.45,3.2) 57(4.45,3.599)
  oval 0.2x0.8 smd paste-100: 20(-3.599,-4.45) 21(-3.2,-4.45) 22(-2.799,-4.45) 23(-2.4,-4.45) 24(-1.999,-4.45) 25(-1.6,-4.45) 26(-1.199,-4.45) 27(-0.8,-4.45) 28(-0.399,-4.45) 29(0,-4.45) 30(0.399,-4.45) 31(0.8,-4.45) 32(1.199,-4.45) 33(1.6,-4.45) 34(1.999,-4.45) 35(2.4,-4.45) 36(2.799,-4.45) 37(3.2,-4.45) 38(3.599,-4.45) 58(3.599,4.45) 59(3.2,4.45) 60(2.799,4.45) 61(2.4,4.45) 62(1.999,4.45) 63(1.6,4.45) 64(1.199,4.45) 65(0.8,4.45) 66(0.399,4.45) 67(0,4.45) 68(-0.399,4.45) 69(-0.8,4.45) 70(-1.199,4.45) 71(-1.6,4.45) 72(-1.999,4.45) 73(-2.4,4.45) 74(-2.799,4.45) 75(-3.2,4.45) 76(-3.599,4.45)
  rect 5.5x5.5 smd paste-100: 77(0,0)
  silkscreen extent -5.36,-4.7 4.7,4.7, body extent -4.5,-4.5 4.5,4.5, height 0.85
R0402_L [mm] "1/16W贴片电阻"
  rect 0.5x0.5 smd: 1(-0.425,0) 2(0.425,0)
  silkscreen extent -0.88,-0.46 0.87,0.46, body extent -0.5,-0.25 0.5,0.25, height 0.3
"SATA 15P 贴片" [mm] "SATA"
  rect 0.6x2.9 smd: P1(16.99,1.5) P2(18.26,1.5) P3(19.53,1.5) P4(20.8,1.5) P5(22.07,1.5) P6(23.34,1.5) P7(24.61,1.5) P8(25.88,1.5) P9(27.15,1.5) P10(28.42,1.5) P11(29.69,1.5) P12(30.96,1.5) P13(32.23,1.5) P14(33.5,1.5) P15(34.77,1.5) S1(3.02,1.5) S2(4.29,1.5) S3(5.56,1.5) S4(6.83,1.5) S5(8.1,1.5) S6(9.37,1.5) S7(10.64,1.5)
  rect 2.4x2.8 smd: SH1(-3.19,0) SH2(40.75,0)
  round 1 hole 1.2 unplated: ""(0,0) ""(38,0)
  body extent -3.97,-2.88 41.47,2.68, height 10.2
SMMS0420 [mm] "贴片电感"
  rect 1.724x1.92 smd paste+0.051 mask+0.102: 1(2.278,0) 2(-2.278,0)
  silkscreen extent -2.38,-2.23 2.38,2.23, body extent -2.37,-2.25 2.37,2.25, height 2
SOP8_L [mm] "4*5*1.8mm（长宽高）"
  rect 1.5x0.5 smd: 1(-2.5,1.905)
  oval 1.5x0.5 smd: 2(-2.5,0.635) 3(-2.5,-0.635) 4(-2.5,-1.905) 5(2.5,-1.905) 6(2.5,-0.635) 7(2.5,0.635) 8(2.5,1.905)
  silkscreen extent -2.69,-2.5 1.52,3.2, body extent -3,-2.5 3,2.5, height 1.9
SOT23-6L [mm] "3x1.6x1.1mm(长宽高)"
  rect 0.45x1 smd: 1(-0.95,-1.397) 2(0,-1.397) 3(0.95,-1.397) 4(0.95,1.397) 5(0,1.397) 6(-0.95,1.397)
  silkscreen extent -1.77,-1.78 1.55,0.51, body extent -1.5,-1.4 1.5,1.4, height 1.15
"TypeC 24p 直立" [mm]
  rect 0.3x1 smd paste-100: A1(-2.75,0.72) A2(-2.25,0.72) A3(-1.75,0.72) A4(-1.25,0.72) A5(-0.75,0.72) A6(-0.25,0.72) A7(0.25,0.72) A8(0.75,0.72) A9(1.25,0.72) A10(1.75,0.72) A11(2.25,0.72) A12(2.75,0.72) B1(2.75,-0.72) B2(2.25,-0.72) B3(1.75,-0.72) B4(1.25,-0.72) B5(0.75,-0.72) B6(0.25,-0.72) B7(-0.25,-0.72) B8(-0.75,-0.72) B9(-1.25,-0.72) B10(-1.75,-0.72) B11(-2.25,-0.72) B12(-2.75,-0.72)
  round 1.3 hole 0.7: SH1(-2.4,-2.15) SH2(2.4,-2.15) SH3(2.4,2.15) SH4(-2.4,2.15)
  Keep-Out Layer board cut-out: 4.244,0 4.244,-0.056 4.203,-0.16 4.126,-0.241 4.024,-0.287 3.968,-0.29 3.968,-0.29 3.556,-0.29 3.499,-0.289 3.393,-0.245 3.312,-0.163 3.268,-0.057 3.268,0 3.268,0.058 3.312,0.164 3.393,0.245 3.499,0.29 3.556,0.29 3.556,0.29 3.97,0.29 4.026,0.287 4.127,0.24 4.203,0.159 4.244,0.056 4.244,0 4.244,0
  Keep-Out Layer board cut-out: -3.42,0 -3.42,-0.066 -3.47,-0.187 -3.563,-0.28 -3.684,-0.33 -3.816,-0.33 -3.937,-0.28 -4.03,-0.187 -4.08,-0.066 -4.08,0 -4.08,0.066 -4.03,0.187 -3.937,0.28 -3.816,0.33 -3.684,0.33 -3.563,0.28 -3.47,0.187 -3.42,0.066 -3.42,0 -3.42,0
  Keep-Out Layer circle w0.005: c-3.75,0 r0.33
  Keep-Out Layer region: 4.244,0 4.244,-0.056 4.203,-0.16 4.126,-0.241 4.024,-0.287 3.968,-0.29 3.968,-0.29 3.556,-0.29 3.499,-0.289 3.393,-0.245 3.312,-0.163 3.268,-0.057 3.268,0 3.268,0.058 3.312,0.164 3.393,0.245 3.499,0.29 3.556,0.29 3.556,0.29 3.97,0.29 4.026,0.287 4.127,0.24 4.203,0.159 4.244,0.056 4.244,0 4.244,0
  Keep-Out Layer region: -3.42,0 -3.42,-0.066 -3.47,-0.187 -3.563,-0.28 -3.684,-0.33 -3.816,-0.33 -3.937,-0.28 -4.03,-0.187 -4.08,-0.066 -4.08,0 -4.08,0.066 -4.03,0.187 -3.937,0.28 -3.816,0.33 -3.684,0.33 -3.563,0.28 -3.47,0.187 -3.42,0.066 -3.42,0 -3.42,0
  Keep-Out Layer lines w0.005: 3.968,-0.29 ccw(c3.954,0) 4.244,0 ccw(c3.954,0) 3.97,0.29 3.556,0.29 ccw(c3.558,0) 3.268,0 ccw(c3.558,0) 3.556,-0.29 3.968,-0.29
  silkscreen extent -5,-2 5,2, body extent -4.47,-2.3 4.47,2.3, height 9.2
"USB3.1_Type-A 立式直插" [mil] "USB接口"
  round 47.2 hole 27.6: 1(-137.8,-29.5) 2(-39.4,-29.5) 3(39.4,-29.5) 4(137.8,-29.5) 5(157.5,29.5) 6(78.7,29.5) 7(0,29.5) 8(-78.7,29.5) 9(-157.5,29.5)
  round 118.1 hole 90.9: 10(-252,-25.6) 11(252,-25.6)
  silkscreen extent -270,-149 270,91, body extent -283,-163 283,112, height 461
XH2.54-WS-2P [mm] "长：10mm，宽：8mm，高：6.1mm"
  rect 2x3.5 smd: 0(-4.327,-2.15) 0(4.327,-2.15)
  rect 1.2x3.5 smd: 1(-1.25,4.981) 2(1.25,4.981)
  silkscreen extent -5,-4.06 5,4.06, body extent -5,-4 5,6.42, height 6.05
ZH1.5-WS-2P [mm] "长：6.1mm，宽：2.5mm，高：3.7mm"
  rect 1.5x1.95 smd: 0(-2.818,0) 0(2.818,0)
  rect 0.8x2.5 smd: 1(-0.75,4.05) 2(0.75,4.05)
  silkscreen extent -3.05,-2 3.03,4.06, body extent -3.05,-2 3.05,4.6, height 3.75

## Part data
C1 C2 C3 C4 C5 C6 C7 C8 C9 C10 C11 C12 C13 C14 C15 C16 C17 C18 C19 C20 C21 C22 C23 C24 C25 C26 C27 C28 C29 C30 C31 C32 C33 C34 C35 C36 C37 C38 C39 C40 C41 C42 C43 C44 C45 C46 C47 C48 C49 C50 C51 C52 C53 C54 C55 C56 C57 C58 C59 C60 C61 C62 C63 C64 C65 C66 C67 C68 C69 C70 C71 C72 C73 C74 C75 C76 C77 C78 C79 C80 C81 C82 C83 C84 C85 C86 C87 C88 C89 C90 C91 C92 C93 C94 C95 C96 C97 C98 C99 C100 C101 C102 C103 C104 C105 C106 C107 C108 C109 C110 C111 C112 C113 C114 C115 C116 C117 C118 C119 C120 C121 C122: library part C, "无极性贴片电容", BOM名称=无极性贴片电容, 学习资源=www.ooocke.com, 材质=X7R, 版权归属=源创客
CON1: library part P-DC, "低压电源接口", BOM名称=DC电源接口, 学习资源=www.ooocke.com, 版权归属=源创客
E1 E2 E3 E4 E5 E6 E7 E8 E9 E10: library part C-CD, "贴片电解电容", BOM名称=贴片钽电容, 学习资源=www.ooocke.com, 版权归属=源创客
J3: library part "Typec 24p", "USB-C (USB TYPE-C) USB 3.2 Gen 2 (USB 3.1 Gen 2, Superspeed + (USB 3.1)) Receptacle Connector 24 Position Surface Mount, Right Angle; Through Hole", Package=None, Check_prices=https://www.snapeda.com/parts/1054500101/Molex/view-part/?ref=eda, MF=Molex, MP=1054500101, SnapEDA_Link=https://www.snapeda.com/parts/1054500101/Molex/view-part/?ref=snap
J4 J5: "USB接口"
JP1 JP2: library part "Header 2", "2P接插件", BOM名称=2P接插件, 学习资源=www.ooocke.com, 版权归属=源创客
JP3 JP4: library part "Header 6", "6P接插件", BOM名称=6P接插件, 学习资源=www.ooocke.com, 版权归属=源创客
L1 L2 L3 L4 L5 L6 L7: library part L, "小功率贴片电感", BOM名称=小功率贴片电感, 学习资源=www.ooocke.com, 版权归属=源创客
LED1 LED2 LED3 LED4: library part LED-3MM, "插件LED", BOM名称=插件LED, 学习资源=www.ooocke.com, 版权归属=源创客
MR1 MR2 MR3 MR4: library part MARK, "光学定位点", BOM名称=光学定位点, 学习资源=www.ooocke.com, 版权归属=源创客
R1 R2 R3 R4 R5 R6 R7 R8 R9 R10 R11 R12 R13 R14 R15 R16 R17 R18 R19 R20 R21 R22 R23 R24 R25 R26 R27 R28 R29 R30 R31 R32 R33 R34 R35 R36 R37 R38 R39 R40 R41 R42 R43 R44 R45 R46 R47: library part R, "贴片电阻", BOM名称=贴片电阻, 学习资源=www.ooocke.com, 版权归属=源创客
U1 U2 U3 U4 U5: "DCDC Convert"
U7 U9 U14: library part P25D40H
U12 U13: "ESD"
Y1 Y2 Y3: library part Crystal
Q1: BOM名称=场效应管, 学习资源=www.ooocke.com, 描述="P沟道 30V/4.2A", 版权归属=源创客

## Via types
v1: diameter 15.75, hole 11.81, SIGNAL to SIGNAL (Bottom), tented both sides, 673 vias

## Nets (pads, with @x,y where several pads share a name; then routed paths per layer and width w, separated by ;. In a path a pad name is that pad's centre, name@x,y a point inside that pad or via, vN(x,y) a via of type N, cw(c..) or ccw(c..) an arc to the next point about the centre after c; other vN are vias at no path point)
cap_RX1_N: C41.1 J1.S5 | length 904.7
  SIGNAL (Bottom) w4.29: J1.S5@1813.43,2606.09 1813.43,2609.45 ccw(c1796.93,2609.45) 1808.6,2621.11 1806.48,2623.23 ccw(c1799.93,2616.68) 1799.93,2625.95 1797.87,2625.95 cw(c1797.87,2630.24) 1794.83,2627.2 cw(c1797.87,2630.24) 1793.58,2630.24 1793.58,2668.22 cw(c1852.39,2668.22) 1810.78,2709.78 cw(c1837.84,2682.77) 1837.84,2721 2249.21,2721 cw(c2249.21,2665.97) 2288.11,2704.89 ; 2288.14,2704.86 ccw(c2326.81,2743.58) 2326.81,2688.86 2327,2688.86 2342,2688.86 2352,2678.86 2367,2678.86 2377,2688.86 2392,2688.86 2402,2678.86 2417,2678.86 2427,2688.86 2442,2688.86 2452,2678.86 2467,2678.86 2477,2688.86 2514,2688.86 2538.3,2688.86 cw(c2538.3,2684.56) 2541.33,2687.6 cw(c2538.3,2684.56) 2542.59,2684.56 2542.59,2683.52 ccw(c2549.4,2683.52) 2544.58,2678.71 C41.1@2550.28,2673
cap_RX1_P: C43.1 J1.S6 | length 896.7
  SIGNAL (Bottom) w4.29: J1.S6@1763.43,2606.09 1763.43,2609.45 cw(c1779.93,2609.45) 1768.26,2621.11 1770.38,2623.23 cw(c1776.94,2616.68) 1776.94,2625.95 1779,2625.95 ccw(c1779,2630.24) 1782.03,2627.2 ccw(c1779,2630.24) 1783.29,2630.24 1783.29,2672.48 cw(c1842.1,2672.48) 1800.49,2714.04 1803.6,2717.15 cw(c1837.74,2683.01) 1837.74,2731.29 2249.28,2731.29 cw(c2249.28,2666.15) 2295.34,2712.21 ccw(c2326.88,2743.73) 2326.88,2699.14 2538.3,2699.14 ccw(c2538.3,2703.44) 2541.33,2700.4 ccw(c2538.3,2703.44) 2542.59,2703.44 2542.59,2704.48 cw(c2549.4,2704.48) 2544.58,2709.29 C43.1@2550.28,2715 C43.1@2550.14,2715.14
cap_RX2_N: C42.1 J2.S5 | length 555.5
  SIGNAL (Bottom) w4.29: J2.S5@1813.43,1500.84 1813.43,1503.26 ccw(c1794.67,1503.26) 1807.94,1516.52 ccw(c1797.87,1506.45) 1797.87,1520.69 cw(c1797.87,1524.98) 1794.83,1521.95 cw(c1797.87,1524.98) 1793.58,1524.98 1793.58,1575.54 cw(c1815.39,1575.54) 1799.95,1590.95 cw(c1815.39,1575.54) 1815.39,1597.35 2230.3,1597.35 cw(c2230.3,1593.06) 2233.33,1596.1 cw(c2230.3,1593.06) 2234.59,1593.06 2234.59,1592.27 ccw(c2240.8,1592.27) 2236.4,1587.88 C42.1@2242.28,1582
cap_RX2_P: C44.1 J2.S6 | length 571.7
  SIGNAL (Bottom) w4.29: J2.S6@1763.43,1500.84 1763.43,1503.26 cw(c1782.19,1503.26) 1768.93,1516.52 cw(c1779,1506.45) 1779,1520.69 ccw(c1779,1524.98) 1782.03,1521.95 ccw(c1779,1524.98) 1783.29,1524.98 1783.29,1575.58 cw(c1815.3,1575.58) 1783.29,1575.66 cw(c1815.3,1575.58) 1792.61,1598.16 cw(c1815.3,1575.58) 1792.66,1598.21 1792.74,1598.3 cw(c1815.31,1575.73) 1792.79,1598.34 cw(c1815.31,1575.73) 1815.31,1607.64 2230.3,1607.64 ccw(c2230.3,1611.94) 2233.33,1608.9 ccw(c2230.3,1611.93) 2234.59,1611.93 2234.59,1612.73 cw(c2240.8,1612.73) 2236.41,1617.12 C44.1@2242.28,1623
cap_SSRX1_N: C85.2 U8.19 | length 138.4
  SIGNAL (Bottom) w5.1: C85.2@2840.72,2415 2843.03,2417.31 ccw(c2834.49,2425.85) 2846.56,2425.85 cw(c2851.66,2425.85) 2848.06,2429.46 cw(c2851.66,2425.85) 2851.66,2430.95 2853.76,2430.95 ccw(c2853.76,2441.1) 2860.93,2433.92 2867.68,2440.67 ccw(c2844.52,2463.83) 2877.27,2463.83 2877.27,2487.34 cw(c2911.53,2487.34) 2887.31,2511.56 cw(c2892.48,2506.39) 2892.48,2513.7 cw(c2892.48,2508.88) 2895.88,2512.29 ccw(c2899.29,2515.7) 2899.29,2510.87 U8.19@2907.89,2510.87
cap_SSRX1_P: C86.2 U8.20 | length 138.2
  SIGNAL (Bottom) w5.1: C86.2@2840.72,2457 2843.03,2454.69 cw(c2834.49,2446.15) 2846.56,2446.15 ccw(c2851.66,2446.15) 2848.06,2442.54 ccw(c2851.66,2446.15) 2851.66,2441.05 ccw(c2851.66,2446.15) 2855.27,2442.54 2860.48,2447.75 ccw(c2844.3,2463.92) 2867.17,2463.92 2867.17,2487.37 cw(c2911.44,2487.37) 2880.14,2518.67 2880.2,2518.74 cw(c2892.42,2506.52) 2892.42,2523.8 2892.48,2523.8 ccw(c2892.48,2528.62) 2895.88,2525.21 cw(c2899.29,2521.8) 2899.29,2526.62 U8.20@2907.89,2526.62
cap_SSRX4_N: C63.2 U6.19 | length 138.4
  SIGNAL (Bottom) w5.1: C63.2@3530.72,2415 3533.03,2417.31 ccw(c3524.49,2425.85) 3536.56,2425.85 cw(c3541.66,2425.85) 3538.06,2429.46 cw(c3541.66,2425.85) 3541.66,2430.95 3543.76,2430.95 ccw(c3543.76,2441.1) 3550.93,2433.92 3557.68,2440.67 ccw(c3534.52,2463.83) 3567.27,2463.83 3567.27,2487.34 cw(c3601.53,2487.34) 3577.31,2511.56 cw(c3582.48,2506.39) 3582.48,2513.7 cw(c3582.48,2508.88) 3585.88,2512.29 ccw(c3589.29,2515.7) 3589.29,2510.87 U6.19@3597.89,2510.87
cap_SSRX4_P: C64.2 U6.20 | length 138.2
  SIGNAL (Bottom) w5.1: C64.2@3530.72,2457 3533.03,2454.69 cw(c3524.49,2446.15) 3536.56,2446.15 ccw(c3541.66,2446.15) 3538.06,2442.54 ccw(c3541.66,2446.15) 3541.66,2441.05 ccw(c3541.66,2446.15) 3545.27,2442.54 3550.48,2447.75 ccw(c3534.3,2463.92) 3557.17,2463.92 3557.17,2487.37 cw(c3601.44,2487.37) 3570.14,2518.67 3570.2,2518.74 cw(c3582.42,2506.52) 3582.42,2523.8 3582.48,2523.8 ccw(c3582.48,2528.62) 3585.88,2525.21 cw(c3589.29,2521.8) 3589.29,2526.62 U6.20@3597.89,2526.62
cap_SSTX1_N: C93.2 U11.4 | length 1167.3
  SIGNAL w5.1: v1(2778,2549.8) ccw(c2778,2552.59) 2779.97,2550.61 cw(c2795.27,2535.32) 2795.27,2556.95 2814,2556.95 cw(c2814,2515.79) 2843.11,2544.89 2848.01,2539.99 ccw(c2911,2602.98) 2911,2513.9 3066.64,2513.9 cw(c3066.64,2455.64) 3107.81,2496.86 ; v1@3088.04,1983.03 3085.28,1980.27 ccw(c3093.91,1971.63) 3081.7,1971.63 3081.7,1968.84 ccw(c3100.64,1968.84) 3087.23,1955.47 3088.65,1954.05 ccw(c3113,1978.52) 3112.92,1944 ccw(c3113,1978.52) 3113,1944 3156.69,1944 ccw(c3156.69,1971.31) 3175.99,1951.99 ccw(c3147.03,1980.97) 3188,1980.97 3188,1994.18 cw(c3236.53,1994.18) 3202.2,2028.49 ccw(c3181,2049.71) 3205.04,2031.76 ccw(c3181,2049.71) 3211,2049.71 3211,2068 3201,2078 3201,2093 3211,2103 3211,2118 3211,2169.96 ccw(c3152.96,2169.96) 3194.03,2210.97 ; v1@3088.04,1983.03 ccw(c3086.06,1985) v1(3088.85,1985) ; 3107.84,2496.84 3124.34,2480.34 cw(c3081.33,2437.33) 3142.15,2437.33 3142.15,2419 3142.15,2404 3132.15,2394 3132.15,2379 3142.15,2369 3142.15,2354 3132.15,2344 3132.15,2329 3142.15,2319 3142.15,2304.31 ccw(c3242.25,2304.31) 3145.86,2277.32 ccw(c3242.25,2304.31) 3171.41,2233.59 ccw(c3242.25,2304.31) 3171.47,2233.53 3194,2211
  SIGNAL (Bottom) w5.1: v1@2782.73,2553.37 cw(c2791.37,2544.74) 2791.37,2556.95 2792.89,2556.95 cw(c2792.89,2551.85) 2796.5,2555.46 cw(c2792.89,2551.85) 2797.99,2551.85 2797.99,2551.13 ccw(c2804.84,2551.13) 2799.99,2546.3 C93.2@2805.29,2541 ; U11.4@3084.5,2034.2 3084.5,2023.62 cw(c3079.72,2023.62) 3083.1,2020.24 ccw(c3086.48,2016.86) 3081.7,2016.86 3081.7,1998.37 ccw(c3093.91,1998.37) v1@3085.28,1989.73
cap_SSTX1_P: C92.2 U11.3 | length 1191.9
  SIGNAL w5.1: v1(2778,2574.2) cw(c2778,2571.41) 2779.97,2573.39 ccw(c2795.27,2588.68) 2795.27,2567.05 2818.18,2567.05 cw(c2818.18,2525.89) 2847.29,2555 2852.19,2550.09 ccw(c2915.18,2613.08) 2915.18,2524 3066.8,2524 cw(c3066.8,2456.03) 3114.86,2504.09 3131.53,2487.43 cw(c3081.5,2437.4) 3152.25,2437.4 3152.25,2304.36 ccw(c3242.36,2304.36) 3178.64,2240.64 3201.26,2218.03 cw(c3153.35,2170.12) 3221.1,2170.12 3221.1,2049.51 cw(c3181.5,2049.51) 3209.5,2021.5 ccw(c3237.02,1993.98) 3198.1,1993.98 3198.1,1980.93 cw(c3147.12,1980.93) 3183.23,1944.94 cw(c3147.12,1980.93) 3183.17,1944.88 3183.12,1944.83 cw(c3156.72,1971.22) 3156.72,1933.9 ; v1(3064.45,1985) ccw(c3067.24,1985) v1@3065.26,1983.03 ; v1@3065.26,1983.03 3068.02,1980.27 cw(c3059.39,1971.63) 3071.6,1971.63 3071.6,1966.75 ccw(c3095.59,1966.75) 3078.62,1949.8 ; 3078.63,1949.79 3082.67,1945.75 ccw(c3111.27,1974.36) 3111.27,1933.9 3156.72,1933.9 ; 3158.18,1933.9 3156.72,1933.9
  SIGNAL (Bottom) w5.1: v1@2782.73,2570.63 ccw(c2791.37,2579.26) 2791.37,2567.05 2792.89,2567.05 ccw(c2792.89,2572.15) 2796.5,2568.54 ccw(c2792.89,2572.15) 2797.99,2572.15 2797.99,2572.87 cw(c2804.84,2572.87) 2799.99,2577.7 C92.2@2805.29,2583 ; v1@3068.02,1989.73 ccw(c3059.39,1998.37) 3071.6,1998.37 3071.6,2016.86 ccw(c3066.82,2016.86) 3070.2,2020.24 cw(c3073.58,2023.62) 3068.8,2023.62 U11.3@3068.8,2034.2
cap_SSTX2_N: C97.2 U11.13 | length 168.2
  SIGNAL (Bottom) w5.1: U11.13@3226.2,2034.2 3226.2,2044.78 ccw(c3221.42,2044.78) 3224.8,2048.16 cw(c3228.18,2051.54) 3223.64,2050.06 cw(c3228.18,2051.54) 3223.4,2051.54 3223.4,2108.2 3223.05,2108.55 3223.05,2179.17 cw(c3228.15,2179.17) 3224.54,2182.78 cw(c3228.15,2179.17) 3228.15,2184.27 3228.87,2184.27 ccw(c3228.87,2191.12) C97.2@3233.7,2186.27 ; C97.2@3233.71,2186.28 C97.2@3239,2191.57 ; C97.2@3238.5,2192.07 C97.2@3239,2192.57
cap_SSTX2_P: C96.2 U11.12 | length 168
  SIGNAL (Bottom) w5.1: C96.2@3197,2191.57 C96.2@3202.29,2186.28 ; C96.2@3197,2192.28 C96.2@3197.36,2191.93 ; C96.2@3202.3,2186.27 ccw(c3207.13,2191.12) 3207.13,2184.27 3207.85,2184.27 cw(c3207.85,2179.17) 3211.46,2182.78 cw(c3207.85,2179.17) 3212.95,2179.17 3212.95,2104.36 3213.3,2104.01 3213.3,2051.54 cw(c3208.52,2051.54) 3211.9,2048.16 ccw(c3215.28,2044.78) 3210.5,2044.78 U11.12@3210.5,2034.2
cap_SSTX3_N: C100.2 U11.26 | length 412.8
  SIGNAL (Bottom) w5.1: U11.26@3354.2,1906.2 3364.75,1906.2 ccw(c3364.75,1911.07) 3368.19,1907.62 cw(c3371.63,1904.18) 3371.63,1909.05 3430.23,1909.05 3475.15,1909.05 ccw(c3475.15,1932.87) 3491.99,1916.03 3495.34,1919.38 ccw(c3470.54,1944.18) 3505.61,1944.18 3505.61,1990.86 ccw(c3464.18,1990.86) 3493.48,2020.16 3493.35,2020.29 ccw(c3463.94,1990.88) 3463.94,2032.47 3441.15,2032.47 cw(c3441.15,2075) 3411.07,2044.93 cw(c3431.6,2065.45) 3402.57,2065.45 cw(c3421.83,2065.45) 3408.21,2079.07 3416.81,2087.67 cw(c3420.41,2084.06) 3420.41,2089.16 cw(c3420.41,2084.06) 3424.02,2087.67 3424.61,2087.08 ccw(c3429.63,2092.1) 3429.63,2085 C100.2@3437,2085
cap_SSTX3_P: C98.2 U11.25 | length 405.3
  SIGNAL (Bottom) w5.1: U11.25@3354.2,1922 3364.75,1922 cw(c3364.75,1917.13) 3368.19,1920.57 ccw(c3371.63,1924.02) 3371.63,1919.15 3426.05,1919.15 3475.1,1919.15 ccw(c3475.1,1932.98) 3484.88,1923.2 3488.17,1926.49 ccw(c3470.45,1944.21) 3495.51,1944.21 3495.51,1990.74 ccw(c3463.88,1990.74) 3486.25,2013.11 ccw(c3463.88,1990.74) 3463.88,2022.37 3436.96,2022.37 cw(c3436.96,2064.9) 3406.91,2034.8 ; 3406.89,2034.83 3403.87,2037.85 cw(c3431.39,2065.37) 3392.47,2065.37 3392.47,2065.53 cw(c3421.63,2065.53) 3401.01,2086.15 3409.67,2094.81 ccw(c3406.06,2098.41) 3411.16,2098.41 ccw(c3406.06,2098.41) 3409.67,2102.02 3409.08,2102.61 cw(c3414.1,2107.63) 3407,2107.63 C98.2@3407,2115
cap_SSTX4_N: C99.2 U11.32 | length 1684.9
  SIGNAL w5.1: 3274.71,1807.27 ccw(c3293.58,1788.42) 3266.91,1788.42 3266.91,1729.52 ccw(c3308.52,1729.52) 3279.08,1700.12 ; 3274.72,1807.28 3277.53,1810.08 cw(c3288.44,1799.18) 3288.44,1814.6 3306.73,1814.6 cw(c3306.73,1792.97) 3322.03,1808.26 ccw(c3324,1810.24) v1(3324,1807.45) ; 3279.13,1700.07 ccw(c3305.85,1726.85) 3305.85,1689.02 3464.52,1689.02 cw(c3464.52,1660.67) 3484.57,1680.72 3486.64,1678.64 ccw(c3495.19,1687.19) 3495.19,1675.1 3587.84,1675.1 ccw(c3587.84,1756.7) 3645.5,1698.96 ccw(c3587.84,1756.7) 3645.54,1699 3654.27,1707.73 ; v1@3472.54,2554.29 cw(c3478.97,2547.86) 3478.97,2556.95 3571.29,2556.95 cw(c3571.29,2492.36) 3616.97,2538.03 3635.89,2519.11 3643,2512 cw(c3580.23,2449.23) 3669,2449.23 3669,2214 3669,2199 3659,2189 3659,2174 3669,2164 3669,2149 3659,2139 3659,2124 3669,2114 3669,2099 3659,2089 3659,2074 3669,2064 3669,2049 3659,2039 3659,2024 3669,2014 3669,1999 3659,1989 3659,1974 3669,1964 3669,1919 3659,1909 3659,1894 3669,1884 3669,1869 3659,1859 3659,1844 3669,1834 3669,1771 3669,1743.29 cw(c3618.71,1743.29) 3654.3,1707.76
  SIGNAL (Bottom) w5.1: v1@3329.1,1811.39 cw(c3336.86,1803.62) 3336.86,1814.6 cw(c3336.86,1809.82) 3340.24,1813.2 ccw(c3343.62,1816.58) 3343.62,1811.8 U11.32@3354.2,1811.8 ; v1(3467,2549.8) ccw(c3467,2552.59) v1@3468.97,2550.61 ; v1@3468.97,2550.61 3471.73,2553.37 cw(c3480.37,2544.74) 3480.37,2556.95 3482.89,2556.95 cw(c3482.89,2551.85) 3486.5,2555.46 cw(c3482.89,2551.85) 3487.99,2551.85 3487.99,2551.13 ccw(c3494.84,2551.13) 3489.99,2546.3 C99.2@3495.29,2541
cap_SSTX4_P: C101.2 U11.31 | length 1691.3
  SIGNAL w5.1: 3271.9,1693.02 3272.02,1692.9 ; 3271.89,1693.03 cw(c3308.31,1729.43) 3256.81,1729.43 3256.81,1788.51 cw(c3293.36,1788.51) 3267.52,1814.35 3270.44,1817.28 cw(c3288.35,1799.37) 3288.35,1824.7 3306.73,1824.7 ccw(c3306.73,1846.33) 3322.03,1831.04 cw(c3324,1829.06) v1(3324,1831.85) ; 3272.04,1692.87 ccw(c3305.76,1726.63) 3305.76,1678.92 3464.41,1678.92 cw(c3464.41,1660.41) 3477.49,1673.51 3479.54,1671.46 ccw(c3495.14,1687.06) 3495.14,1665 3592.02,1665 ccw(c3592.02,1746.6) 3649.68,1688.86 ccw(c3592.02,1746.6) 3649.72,1688.9 3661.5,1700.68 ccw(c3619.01,1743.17) 3679.1,1743.17 3679.1,2449.29 ccw(c3580.38,2449.29) 3650.26,2519.02 ccw(c3580.38,2449.29) 3650.19,2519.1 3621.15,2548.13 ccw(c3575.48,2502.46) 3575.48,2567.05 3478.97,2567.05 cw(c3478.97,2576.14) v1@3472.54,2569.71
  SIGNAL (Bottom) w5.1: v1@3329.1,1827.91 ccw(c3336.86,1835.68) 3336.86,1824.7 ccw(c3336.86,1829.48) 3340.24,1826.1 cw(c3343.62,1822.72) 3343.62,1827.5 U11.31@3354.2,1827.5 ; v1(3467,2574.2) cw(c3467,2571.41) v1@3468.97,2573.39 ; v1@3468.97,2573.39 3471.73,2570.63 ccw(c3480.37,2579.26) 3480.37,2567.05 3482.89,2567.05 ccw(c3482.89,2572.15) 3486.5,2568.54 ccw(c3482.89,2572.15) 3487.99,2572.15 3487.99,2572.87 cw(c3494.84,2572.87) 3489.99,2577.7 C101.2@3495.29,2583
cap_SSTX_N: C95.2 U11.49 | length 589.5
  SIGNAL (Bottom) w5.1: C95.2@2744.84,1474 2749.39,1478.54 ccw(c2743.05,1484.88) 2752.01,1484.88 cw(c2757.11,1484.88) 2753.5,1488.48 cw(c2757.11,1484.88) 2757.11,1489.98 3090.9,1489.98 ccw(c3090.9,1559.35) 3139.95,1510.29 3140.13,1510.48 ccw(c3091.08,1559.53) 3160.45,1559.53 3160.45,1666.37 cw(c3165.32,1666.37) U11.49@3161.88,1669.81 ; U11.49@3161.87,1669.81 ccw(c3158.43,1673.25) 3163.3,1673.25 U11.49@3163.3,1683.8
cap_SSTX_P: C94.2 U11.50 | length 573.7
  SIGNAL (Bottom) w5.1: C94.2@2744.72,1516 2749.51,1511.2 cw(c2743.48,1505.18) 2752.01,1505.18 ccw(c2757.11,1505.18) 2753.5,1501.57 ccw(c2757.11,1505.18) 2757.11,1500.08 3090.77,1500.08 ccw(c3090.77,1559.66) 3132.88,1517.51 ; 3132.92,1517.55 ccw(c3090.77,1559.66) 3150.35,1559.66 3150.35,1666.37 ccw(c3145.48,1666.37) 3148.92,1669.81 cw(c3152.37,1673.25) 3147.5,1673.25 U11.50@3147.5,1683.8
cap_TX1_N: C39.1 J1.S3 | length 1351.2
  SIGNAL w4.29: v1(2748,2654.61) cw(c2748,2651.76) 2750.01,2653.78 2752.71,2651.08 ccw(c2761.23,2659.6) 2761.23,2647.55 2771,2647.55 ccw(c2771,2660.96) 2780.47,2651.47 ; 2780.48,2651.48 2788,2659 cw(c2817.67,2629.33) 2817.67,2671.29 3050.75,2671.29 ccw(c3050.75,2709.25) 3077.59,2682.41 ccw(c3060.06,2699.94) 3084.86,2699.94 ; v1(3077.8,2742) ccw(c3080.65,2742) 3078.63,2739.98 cw(c3063.61,2724.96) 3081.99,2735.62 cw(c3063.61,2724.96) 3084.86,2724.96 3084.86,2699.94 ; 3084.86,2698.74 3084.86,2699.94
  SIGNAL (Bottom) w4.29: J1.S3@1913.43,2606.09 1913.43,2609.45 cw(c1929.93,2609.45) 1913.52,2611.16 cw(c1929.93,2609.45) 1918.26,2621.11 1920.38,2623.23 cw(c1926.94,2616.68) 1926.94,2625.95 1929,2625.95 ccw(c1929,2630.24) 1932.03,2627.2 ccw(c1929,2630.24) 1933.29,2630.24 1933.29,2671.1 cw(c1954.38,2671.1) 1939.47,2686.02 1939.54,2686.09 cw(c1954.5,2671.13) 1939.58,2686.13 cw(c1954.5,2671.13) 1954.5,2692.29 2208.47,2692.29 cw(c2208.47,2605.87) 2269.57,2666.98 2269.65,2666.91 ; 2269.68,2666.87 ccw(c2316.37,2713.63) 2316.37,2647.55 2734.77,2647.55 ccw(c2734.77,2659.6) v1@2743.29,2651.08 ; C39.1@3069,2714.43 3074.71,2720.14 cw(c3079.52,2715.32) 3079.52,2722.13 3080.56,2722.13 ccw(c3080.56,2726.42) 3081.92,2722.35 ccw(c3080.56,2726.42) 3083.6,2723.39 ccw(c3080.56,2726.42) 3084.63,2725.06 ccw(c3080.56,2726.42) 3084.86,2726.42 3084.86,2728.77 ccw(c3072.8,2728.77) v1@3081.33,2737.29
cap_TX1_P: C37.1 J1.S2 | length 1349.5
  SIGNAL w4.29: v1(2748,2630.2) ccw(c2748,2633.06) 2750.01,2631.03 2752.71,2633.73 cw(c2761.23,2625.21) 2761.23,2637.26 2771.08,2637.26 ccw(c2771.08,2660.77) 2787.7,2644.15 2792.26,2648.71 cw(c2821.93,2619.04) 2821.93,2661 3050.85,2661 ccw(c3050.85,2709.02) 3084.8,2675.06 3084.9,2675.16 ccw(c3060.15,2699.9) 3084.95,2675.21 ccw(c3060.15,2699.9) 3095.14,2699.9 3095.14,2724.96 cw(c3116.39,2724.96) 3098.01,2735.62 cw(c3116.39,2724.96) 3101.37,2739.98 ccw(c3099.35,2742) v1(3102.2,2742)
  SIGNAL (Bottom) w4.29: J1.S2@1963.43,2606.09 1963.43,2609.45 ccw(c1946.93,2609.45) 1963.34,2611.16 ccw(c1946.93,2609.45) 1958.6,2621.11 1956.48,2623.23 ccw(c1949.93,2616.68) 1949.93,2625.95 1947.87,2625.95 cw(c1947.87,2630.24) 1944.83,2627.2 cw(c1947.87,2630.24) 1943.58,2630.24 1943.58,2671.03 cw(c1954.54,2671.03) 1946.79,2678.79 cw(c1954.54,2671.03) 1954.54,2682 2208.3,2682 cw(c2208.3,2605.46) 2262.42,2659.58 ccw(c2316.3,2713.46) 2262.52,2659.48 ccw(c2316.3,2713.46) 2316.18,2637.26 ccw(c2316.3,2713.46) 2316.3,2637.26 2734.77,2637.26 cw(c2734.77,2625.21) v1@2743.29,2633.73 ; v1@3098.67,2737.29 ccw(c3107.2,2728.77) 3095.14,2728.77 3095.14,2726.42 ccw(c3099.44,2726.42) 3095.37,2725.06 ccw(c3099.44,2726.42) 3096.4,2723.39 ccw(c3099.44,2726.42) 3098.08,2722.35 ccw(c3099.44,2726.42) 3099.44,2722.13 3100.48,2722.13 cw(c3100.48,2715.32) 3105.29,2720.14 C37.1@3111,2714.43